# Altium PCB KOSVT-01.PcbDoc (part 1 of 2)
Units mm, origin at the board's own origin, x right, y up, seen from the top; angles counter-clockwise.
Board outline 70 x 45 mm, 4 copper layers (Top Layer, Layer 1, Layer 2, Bottom Layer), stack 0.954 mm thick; 78 components, 49 nets, 273 pads, 261 vias.
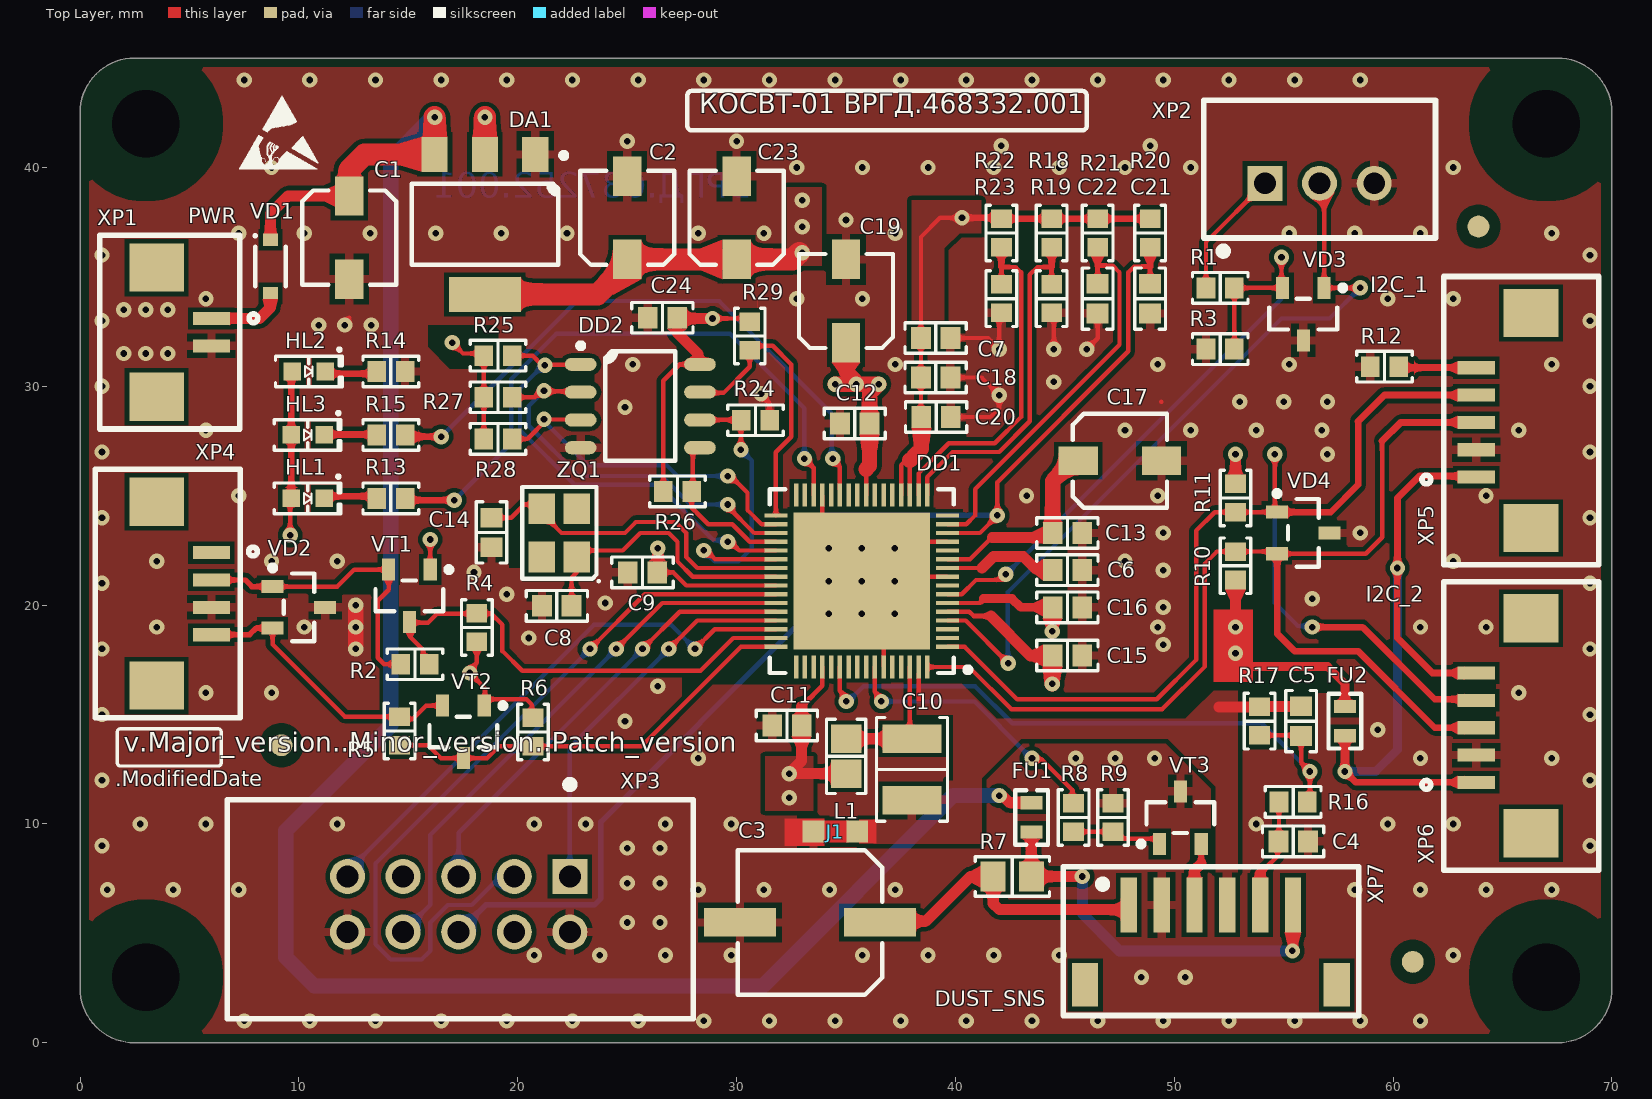
[diagram p0: Top Layer view]
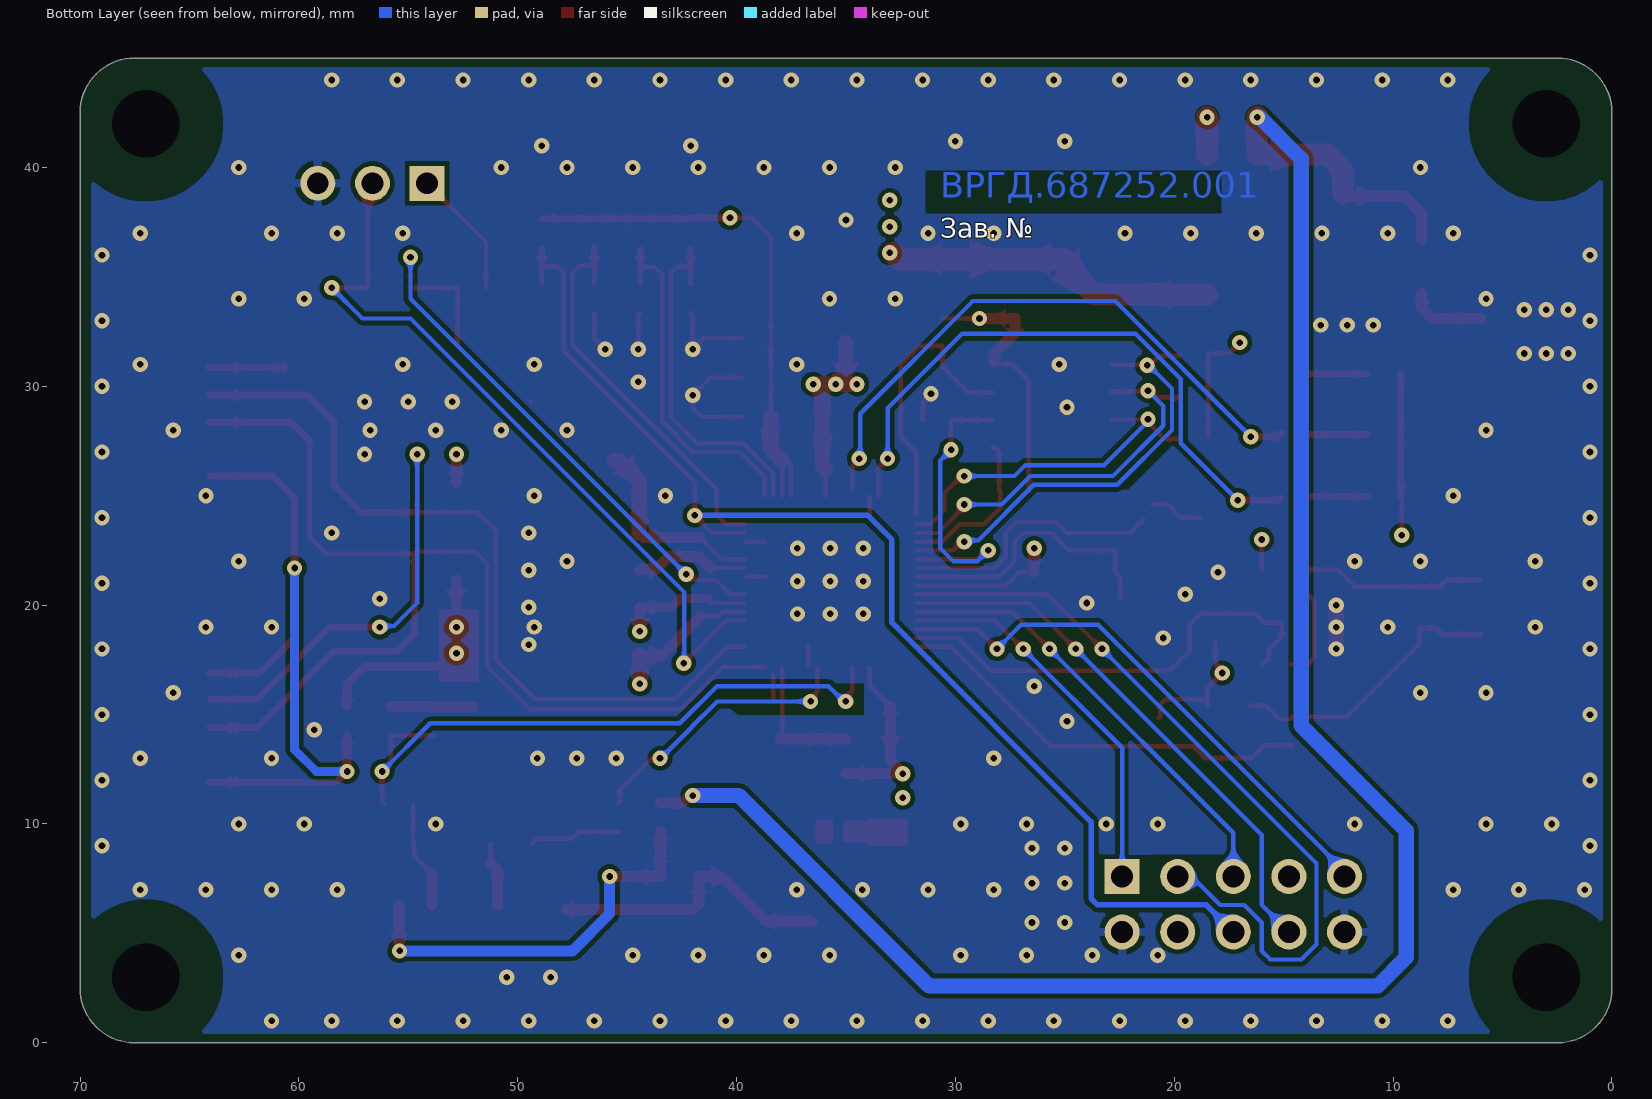
[diagram p1: Bottom Layer view, seen from below]
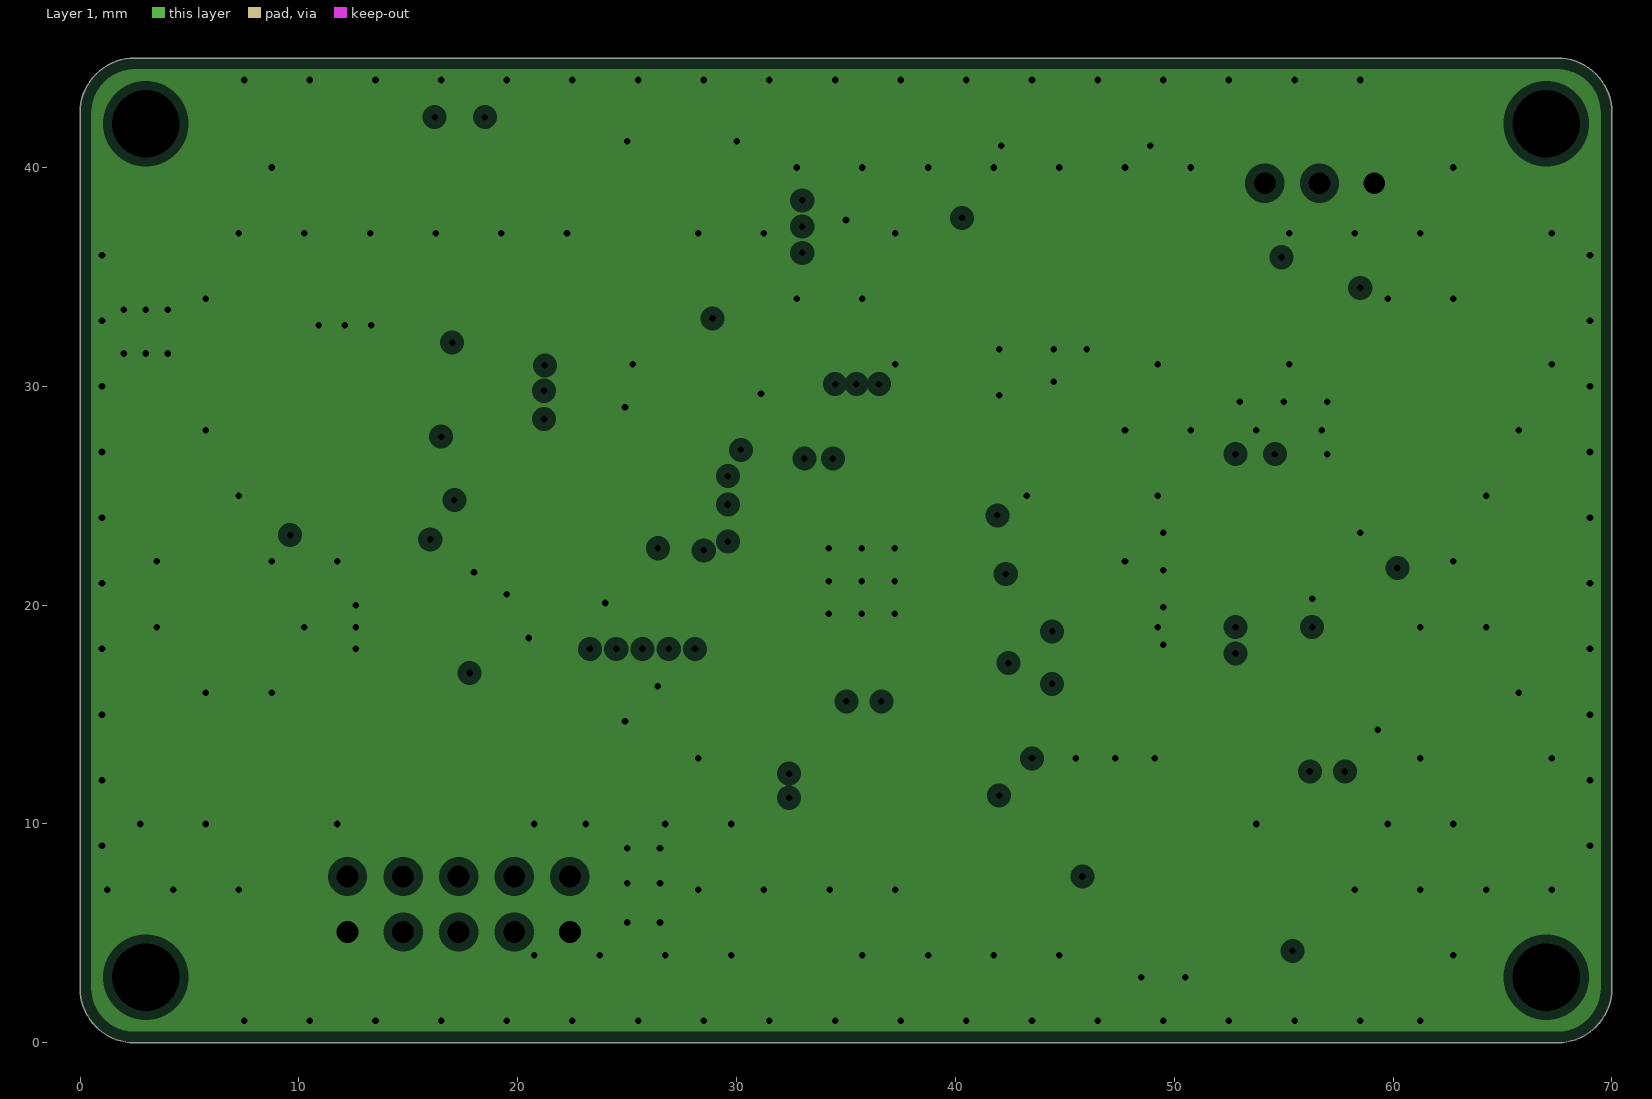
[diagram p2: Layer 1, clearances drawn from the general rule]
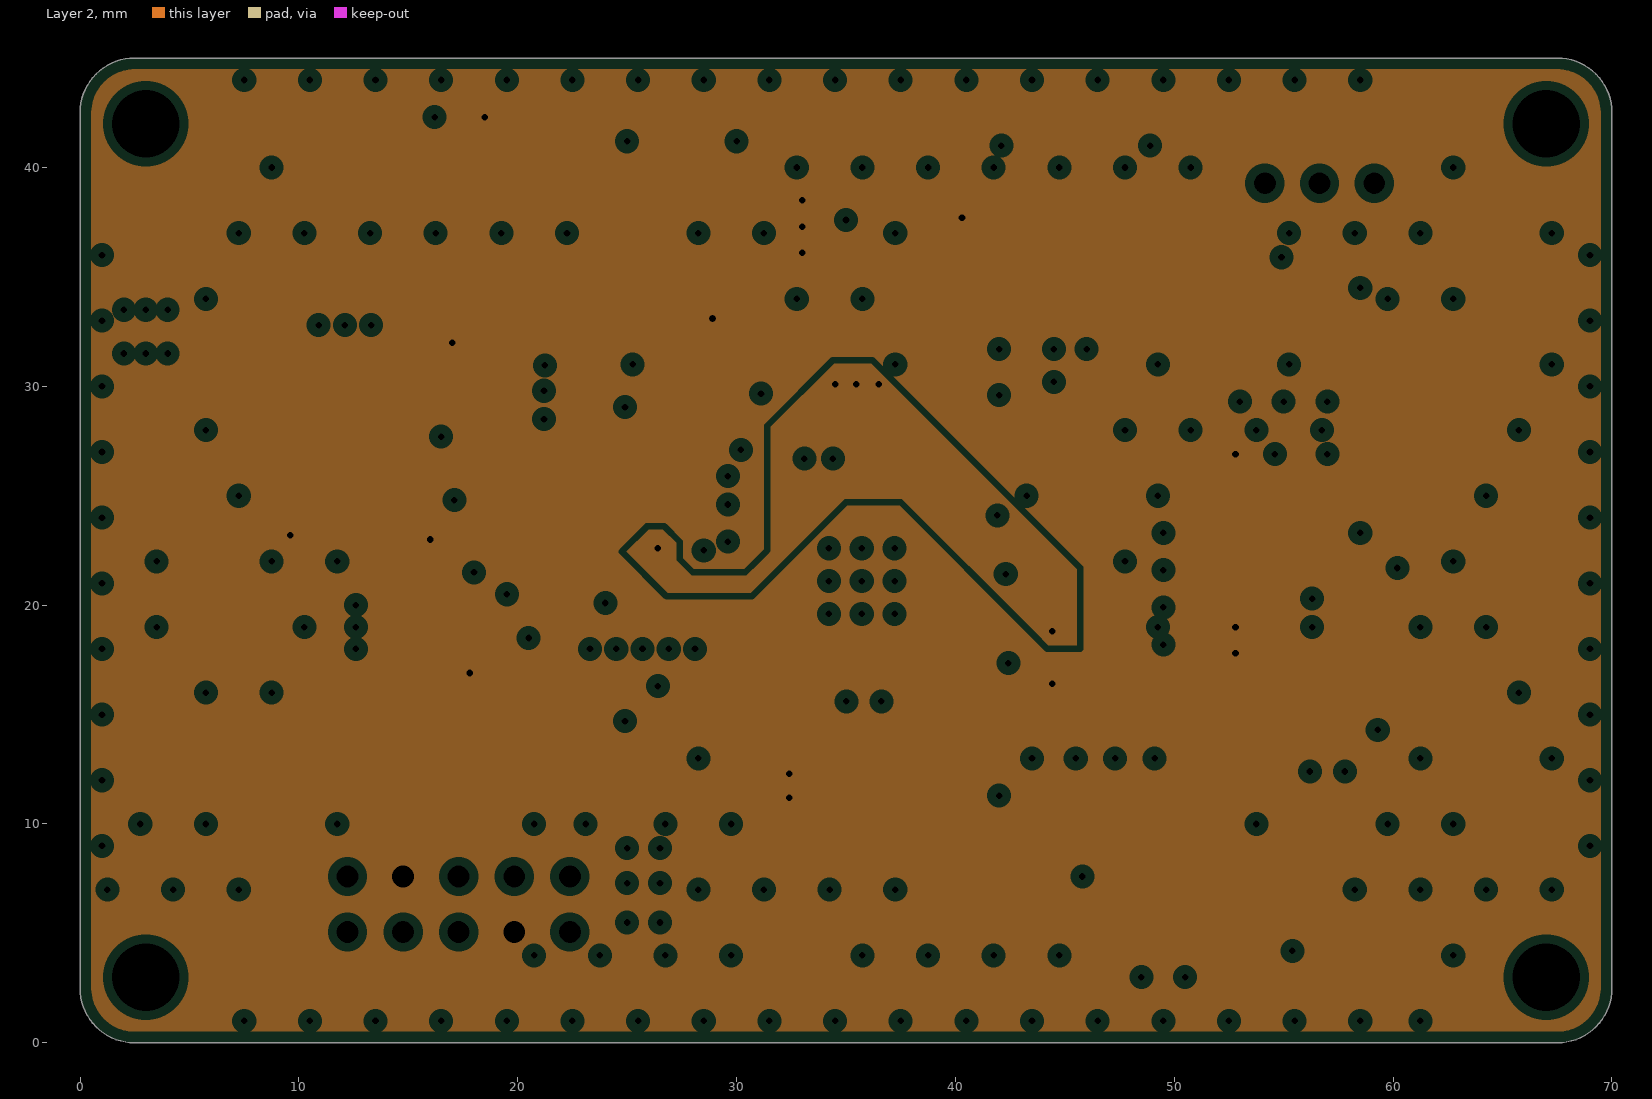
[diagram p3: Layer 2, clearances drawn from the general rule]
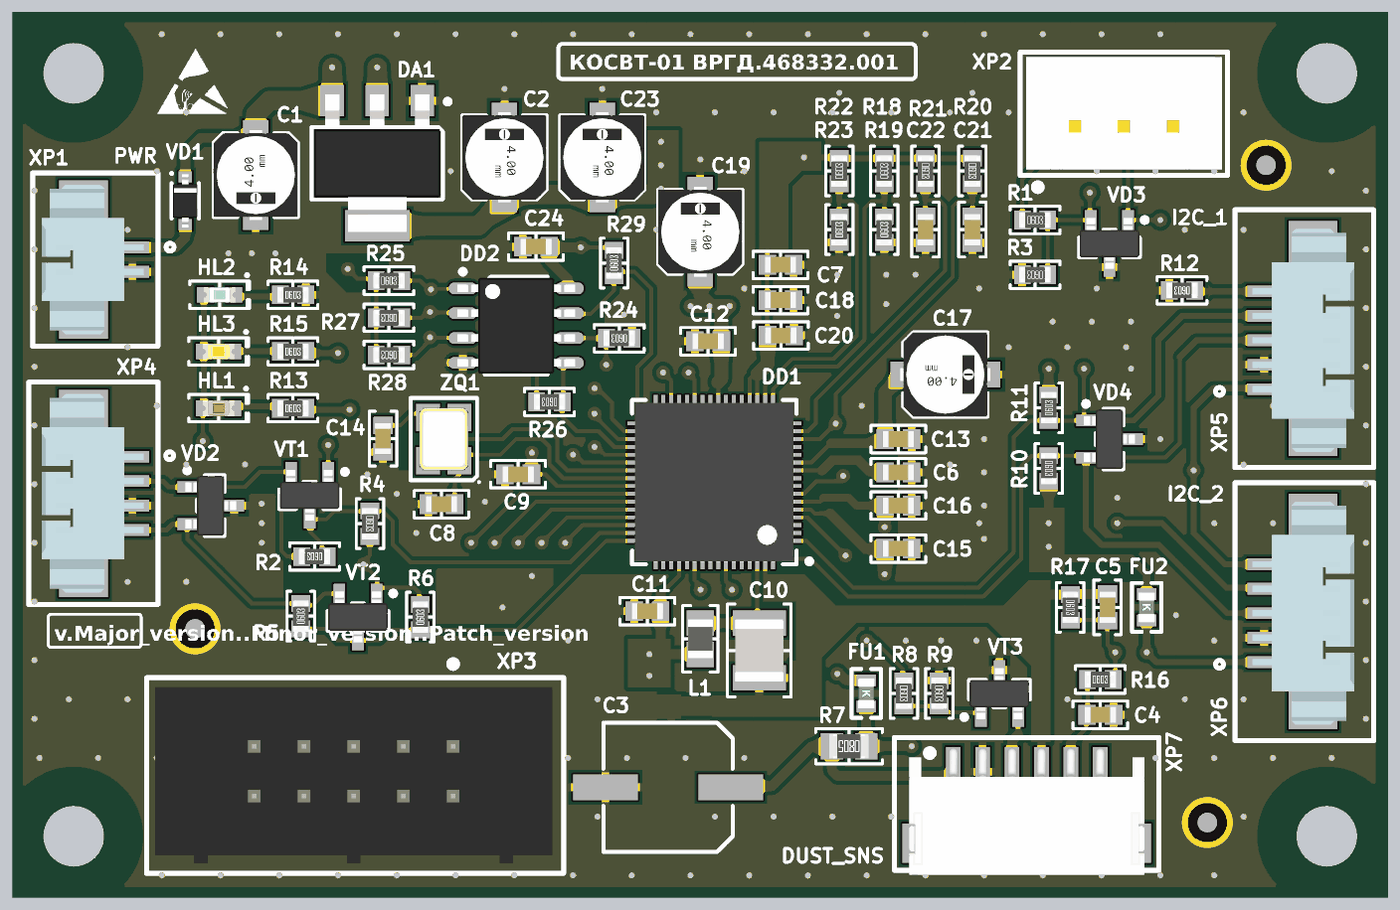
[diagram p4: 3D render of the assembled board from above, using the file's embedded part models]

## Layer stack, top to bottom
Top Solder: solder mask 0.0102, Solder Resist, Dk 3.5
Top Layer: signal copper 0.035
Dielectric 4: prepreg 0.076, FR4, Dk 3.6
Dielectric 2: prepreg 0.076, FR4, Dk 3.6
Layer 1: plane copper 0.035, net GND
Dielectric 1: core 0.51, FR4, Dk 4.6
Layer 2: plane copper 0.035, net +3V3
Dielectric 3: prepreg 0.076, FR4, Dk 3.6
Dielectric 5: prepreg 0.076, FR4, Dk 3.6
Bottom Layer: signal copper 0.035
Bottom Solder: solder mask 0.0102, Solder Resist, Dk 3.5

## Board outline
2.5,0 cw(c2.5,2.5) 0,2.5 0,42.5 cw(c2.5,42.5) 2.5,45 67.5,45 cw(c67.5,42.5) 70,42.5 70,2.5 cw(c67.5,2.5) 67.5,0

## Design rules (kind name [scope] priority, off if disabled: settings)
BoardOutlineClearance [All] p1: gap=0.4 ignorepadtopadclearanceinfootprint=FALSE
Clearance Clearance_RP [Name = 'Free-RP'] p1: gap=0.5 ignorepadtopadclearanceinfootprint=FALSE
Clearance Clearance_MH [Name = 'Free-MH'] p2: gap=2 ignorepadtopadclearanceinfootprint=FALSE
Clearance [All] p3: gap=0.2 ignorepadtopadclearanceinfootprint=FALSE
HoleSize [All] p1: absolutevalues=TRUE maxlimit=5 minlimit=0.025 maxpercent=80.000 minpercent=20.000
MinimumSolderMaskSliver [All] p1: minsoldermaskwidth=0.05
PlaneClearance [Name = 'Free-MH'] p1: clearance=2
PlaneClearance PlaneClearance_All [All] p2: clearance=0.4
PlaneConnect [All] p1: pad.planeconnectstyle=Relief pad.reliefexpansion=0.508 pad.reliefentries=4 pad.reliefconductorwidth=0.254 pad.reliefairgap=0.254 via.planeconnectstyle=Direct via.reliefexpansion=0.508 via.reliefentries=4 via.reliefconductorwidth=0.254 via.reliefairgap=0.254
PolygonConnect PolygonConnect_3V3 [InNet('+3V3')] p1: thpad.connectstyle=Relief thpad.reliefconductorwidth=0.5 thpad.reliefentries=4 thpad.polygonreliefangle="90 Angle" thpad.airgapwidth=0.3 smdpad.connectstyle=Relief smdpad.reliefconductorwidth=0.5 smdpad.reliefentries=4 smdpad.polygonreliefangle="90 Angle" smdpad.airgapwidth=0.3 via.connectstyle=Direct via.reliefconductorwidth=0.254 via.reliefentries=4 via.polygonreliefangle="90 Angle" via.airgapwidth=0.254
PolygonConnect PolygonConnect_AGND [InNet('AGND')] p2: thpad.connectstyle=Relief thpad.reliefconductorwidth=0.4 thpad.reliefentries=4 thpad.polygonreliefangle="90 Angle" thpad.airgapwidth=0.25 smdpad.connectstyle=Relief smdpad.reliefconductorwidth=0.4 smdpad.reliefentries=4 smdpad.polygonreliefangle="90 Angle" smdpad.airgapwidth=0.25 via.connectstyle=Direct via.reliefconductorwidth=0.254 via.reliefentries=4 via.polygonreliefangle="90 Angle" via.airgapwidth=0.254
PolygonConnect [All] p3: thpad.connectstyle=Relief thpad.reliefconductorwidth=0.4 thpad.reliefentries=4 thpad.polygonreliefangle="90 Angle" thpad.airgapwidth=0.25 smdpad.connectstyle=Relief smdpad.reliefconductorwidth=0.4 smdpad.reliefentries=4 smdpad.polygonreliefangle="90 Angle" smdpad.airgapwidth=0.25 via.connectstyle=Direct via.reliefconductorwidth=0.254 via.reliefentries=4 via.polygonreliefangle="90 Angle" via.airgapwidth=0.254
RoutingVias [All] p1: holewidth=0.3 width=1.2 viastyle="Through Hole" minholewidth=0.2 minwidth=0.6 maxholewidth=0.5 maxwidth=1
SilkToSilkClearance [All] p1: silktosilkclearance=0.2
SilkToSolderMaskClearance [IsPad] p1: minsilkscreentomaskgap=0.05 clearancetoexposedcopper=TRUE
SolderMaskExpansion [All] p1: expansion=0.102 istentingtop=FALSE
SupplyNets "Schematic Supply Nets_5" [InNet('GND')] p1: voltage=0.000
SupplyNets "Schematic Supply Nets_4" [InNet('+5V_Fus')] p2: voltage=0.000
SupplyNets "Schematic Supply Nets_3" [InNet('AGND')] p3: voltage=0.000
SupplyNets "Schematic Supply Nets_2" [InNet('+3V3_Fus')] p4: voltage=0.000
SupplyNets "Schematic Supply Nets_1" [InNet('+3V3')] p5: voltage=0.000
SupplyNets "Schematic Supply Nets" [InNet('+5V')] p6: voltage=0.000
Width [All] p1: maxlimit=1 minlimit=0.15 preferedwidth=0.2
24 further rules are at their usual default settings.

## Classes and differential pairs
component class MCU: C5 C6 C7 C8 C9 C10 C11 C12 C13 C14 C15 C16 C17 C18 C19 C20 C21 C22 C23 C24 DD1 DD2 HL1 HL2 HL3 J1 L1 R13 R14 R15 R16 R17 R18 R19 R20 R21 R22 R23 R24 R25 R26 R27 R28 R29 ZQ1
component class MAIN: C1 C2 C3 C4 DA1 FU1 FU2 R1 R2 R3 R4 R5 R6 R7 R8 R9 R10 R11 R12 VD1 VD2 VD3 VD4 VT1 VT2 VT3 XP1 XP2 XP3 XP4 XP5 XP6 XP7

## Components (designator, comment, footprint, x,y, rotation, side; value= is the part's Value field where it differs from the comment)
C1 "10uF" "CAP ALSMD ELEC 4.3MM H5.4MM" 12.3,36.8 r270 top
C2 "22uF" "CAP ALSMD ELEC 4.3MM H5.4MM" 25,37.7 r90 top
C3 "220uF" "CAP ALSMD ELEC 6.6MM H7.7MM" 33.353,5.5 r180 top
C4 "0.01uF" "CAP 0603_1608" 55.435,9.206 r0 top
C5 "0.01uF" "CAP 0603_1608" 55.8,14.7 r90 top
C6 "0.068uF" "CAP 0603_1608" 45.118,21.6 r180 top
C7 "0.068uF" "CAP 0603_1608" 39.1,32.208 r180 top
C8 "10pF" "CAP 0603_1608" 21.783,19.971 r0 top
C9 "0.068uF" "CAP 0603_1608" 25.7,21.5 r0 top
C10 "1uF" "CAP 1210_3225 - 1.8MM" 38.018,12.495 r90 top
C11 "0.068uF" "CAP 0603_1608" 32.3,14.5 r0 top
C12 "0.068uF" "CAP 0603_1608" 35.4,28.3 r0 top
C13 "0.068uF" "CAP 0603_1608" 45.118,23.3 r180 top
C14 "10pF" "CAP 0603_1608" 18.8,23.325 r90 top
C15 "0.068uF" "CAP 0603_1608" 45.118,17.7 r180 top
C16 "0.068uF" "CAP 0603_1608" 45.118,19.9 r180 top
C17 "2.2uF" "CAP ALSMD ELEC 4.3MM H5.4MM" 47.518,26.6 r0 top
C18 "0.068uF" "CAP 0603_1608" 39.1,30.404 r180 top
C19 "2.2uF" "CAP ALSMD ELEC 4.3MM H5.4MM" 35,33.9 r90 top
C20 "0.068uF" "CAP 0603_1608" 39.118,28.6 r180 top
C21 "0.068uF" "CAP 0603_1608" 48.9,34.006 r90 top
C22 "0.068uF" "CAP 0603_1608" 46.5,34.006 r90 top
C23 "10uF" "CAP ALSMD ELEC 4.3MM H5.4MM" 30,37.7 r90 top
C24 "0.068uF" "CAP 0603_1608" 26.612,33.134 r0 top
DA1 "AMS1117-3.3 UMW" "DIODES SOT-223" 18.5,37.4 r270 top
DD1 "К1948ВК018 АДКБ.431290.418ТУ" QFN40P800X800X76_HS-65M 35.718,21.1 r180 top
DD2 "W25Q16JVSNIQ" "WINBOND SOIC-8" 25.6,29.1 r0 top
FU1 "MF-FSMF010X Bourns" "FUSE 0603_1608 0.5MM" 43.479,10.3 r270 top
FU2 "MF-FSMF010X Bourns" "FUSE 0603_1608 0.5MM" 57.8,14.7 r270 top
HL1 "ИПД169А9-К АЕЯР.432220.765 ТУ" "LED 0603_1608 RED" 10.402,24.878 r0 top
HL2 "ИПД169А9-Л АЕЯР.432220.765 ТУ" "LED 0603_1608 GREEN" 10.452,30.678 r0 top
HL3 "ИПД169А9-Ж АЕЯР.432220.765 ТУ" "LED 0603_1608 YELLOW" 10.402,27.778 r0 top
J1 "=Value" NET_TIE_1MM 35.516,9.654 r180 top net-tie
L1 "220ohm 100MHz" "FER 0805_2012" 35.004,13.091 r270 top
R1 "1.2k" "RES 0603_1608"#1 52.1,34.5 r0 top
R2 "0" "RES 0603_1608"#1 15.3,17.3 r180 top
R3 "2k" "RES 0603_1608"#1 52.1,31.7 r180 top
R4 "4.7k" "RES 0603_1608"#1 18.13,18.978 r270 top
R5 "0" "RES 0603_1608"#1 14.6,14.25 r90 top
R6 "4.7k" "RES 0603_1608"#1 20.7,14.2 r90 top
R7 "150" "RES 0805_2012" 42.6,7.6 r180 top
R8 "10" "RES 0603_1608"#1 45.4,10.3 r270 top
R9 "10k" "RES 0603_1608"#1 47.204,10.3 r270 top
R10 "4.7k" "RES 0603_1608"#1 52.8,21.8 r270 top
R11 "4.7k" "RES 0603_1608"#1 52.8,24.9 r90 top
R12 "10k" "RES 0603_1608"#1 59.606,30.9 r180 top
R13 "470" "RES 0603_1608"#2 14.202,24.878 r0 top
R14 "470" "RES 0603_1608"#2 14.202,30.678 r0 top
R15 "470" "RES 0603_1608"#2 14.202,27.778 r0 top
R16 "4.7k" "RES 0603_1608"#1 55.435,11.01 r0 top
R17 "1.2k" "RES 0603_1608"#1 53.9,14.7 r270 top
R18 "0" "RES 0603_1608"#1 44.4,37.006 r90 top
R19 "10k" "RES 0603_1608"#1 44.4,34.006 r90 top
R20 "10k" "RES 0603_1608"#1 48.9,37.006 r270 top
R21 "10k" "RES 0603_1608"#1 46.5,37.006 r270 top
R22 "0" "RES 0603_1608"#1 42.1,37.006 r90 top
R23 "10k" "RES 0603_1608"#1 42.1,34.006 r90 top
R24 "10k" "RES 0603_1608"#1 30.863,28.451 r180 top
R25 "10k" "RES 0603_1608"#1 19.1,31.4 r0 top
R26 "10k" "RES 0603_1608"#1 27.3,25.2 r180 top
R27 "10k" "RES 0603_1608"#1 19.1,29.5 r180 top
R28 "10k" "RES 0603_1608"#1 19.1,27.6 r180 top
R29 "10k" "RES 0603_1608"#1 30.6,32.3 r90 top
VD1 "1N5817WS Hottech" "MCC SOD-323" 8.7,35.48 r90 top
VD2 "PESD5V0U1UT" "SOT-23-3 N" 10,19.9 r0 top
VD3 "PESD5V0U1UT" "SOT-23-3 N" 55.9,33.3 r270 top
VD4 "PESD5V0U1UT" "SOT-23-3 N" 55.9,23.3 r0 top
VT1 "2П526А9 АЕЯР.432140.897ТУ" "SOT-23-3 N" 15.051,20.426 r270 top
VT2 "2П526А9 АЕЯР.432140.897ТУ" "SOT-23-3 N" 17.519,14.208 r270 top
VT3 "2П526А9 АЕЯР.432140.897ТУ" "SOT-23-3 N" 50.283,10.291 r90 top
XP1 "DS1020-02-02MVT1R" DS1020-02-02MVT1R 6,33.1 r270 top locked
XP2 "DS1069-3MVW6X" CONNFLY_DS1069-3M 54.139,39.279 r0 top
XP3 "DS1013-10S" DS1013-10S 22.38,7.603 r0 top
XP4 "DS1020-02-04MVT1R" DS1020-02-04MVT1R 6,22.4 r270 top locked
XP5 "DS1020-02-05MVT1R" DS1020-02-05MVT1R 63.8,25.85 r90 top
XP6 "DS1020-02-05MVT1R" DS1020-02-05MVT1R 63.8,11.9 r90 top
XP7 "S6B-ZR-SM4A-TF" "JST S6B-ZR-SM4A-TF" 57.425,2.65 r180 top
ZQ1 "32MHz" XTAL3225X07N 21.9,23.3 r90 top

## Footprints (in the part's own frame and the unit in brackets; to place one, negate y for a bottom-side part, rotate by r counter-clockwise, add the part's x,y. Pads: shape width x height; smd on the part's side, far side on the other; paste and mask are expansions set on the pad)
"CAP 0603_1608" [mm] "Chip Capacitor, 2-Leads, Body 1.60x0.80mm, IPC Medium Density"
  rect 0.9x1 smd: 1(-0.675,0) 2(0.675,0)
  silkscreen extent -1.4,-0.7 1.4,0.7, body extent -0.8,-0.41 0.8,0.41, height 0.82
"CAP 1210_3225 - 1.8MM" [mm] "Chip Capacitor, 2-Leads, Body 3.20x2.50mm, IPC Medium Density"
  rect 1.3x2.7 smd: 1(-1.4,0) 2(1.4,0)
  silkscreen extent -2.37,-1.63 2.37,1.63, body extent -1.6,-1.25 1.6,1.25, height 1.8
"CAP ALSMD ELEC 4.3MM H5.4MM" [mm] "Aluminum SMD Electrolytic Capacitor, 4.30mm Land Size, 4.00mm Diameter, 5.40mm Height, 4.60mm Maximum Leads Span"
  rect 1.8x1.3 smd: 1(-1.9,0) 2(1.9,0)
  silkscreen extent -2.15,-2.15 2.15,2.15, body extent -2.3,-2.15 2.3,2.15, height 5.4
"CAP ALSMD ELEC 6.6MM H7.7MM" [mm] "Aluminum SMD Electrolytic Capacitor, 6.60mm Land Size, 6.30mm Diameter, 7.70mm Height, 8.00mm Maximum Leads Span"
  rect 3.3x1.3 smd: 1(-3.2,0) 2(3.2,0)
  silkscreen extent -3.3,-3.3 3.3,3.3, body extent -4,-3.3 4,3.3, height 7.7
CONNFLY_DS1069-3M [mm]
  rect 1.6x1.6 hole 1: 1(0,0)
  round 1.6 hole 1: 2(2.5,0) 3(5,0)
  silkscreen extent -2.8,-3.25 7.8,3.8, body extent -2.5,-2.2 7.5,3.55, height 7
"DIODES SOT-223" [mm] "SOT223, 4-Leads, Body 6.50x7.00mm (avg), Pitch 2.30mm, IPC Medium Density"
  rect 1.6x1.2 smd: 1(-3.2,2.3) 2(-3.2,0) 3(-3.2,-2.3)
  rect 1.6x3.3 smd: 4(3.2,0)
  silkscreen extent -3.27,-3.35 1.85,3.73, body extent -3.52,-3.25 3.5,3.25, height 1.8
DS1013-10S [mm]
  rect 1.6x1.6 hole 1: 1(0,0)
  round 1.6 hole 1: 2(0,-2.54) 3(-2.54,0) 4(-2.54,-2.54) 5(-5.08,0) 6(-5.08,-2.54) 7(-7.62,0) 8(-7.62,-2.54) 9(-10.16,0) 10(-10.16,-2.54)
  silkscreen extent -15.66,-6.5 5.64,4.35, body extent -15.23,-5.98 5.07,3.02, height 8.9
DS1020-02-02MVT1R [mm]
  rect 0.6x1.7 smd: 1(0,0) 2(1.25,0)
  rect 2.2x2.5 smd: M(-2.325,-2.5) M(3.575,-2.5)
  silkscreen extent -3.8,-5.1 5.05,2.12, body extent -3.2,-4.62 4.45,0.58, height 3.35
DS1020-02-04MVT1R [mm]
  rect 0.6x1.7 smd: 1(0,0) 2(1.25,0) 3(2.5,0) 4(3.75,0)
  rect 2.2x2.5 smd: M(-2.325,-2.5) M(6.075,-2.5)
  silkscreen extent -3.81,-5.3 7.55,2.1, body extent -3.2,-4.62 6.95,0.58, height 3.35
DS1020-02-05MVT1R [mm]
  rect 0.6x1.7 smd: 1(0,0) 2(1.25,0) 3(2.5,0) 4(3.75,0) 5(5,0)
  rect 2.2x2.5 smd: M(-2.325,-2.5) M(7.5,-2.5)
  silkscreen extent -4.01,-5.6 9.17,2.48, body extent -3.2,-4.6 8.2,0.6, height 3.35
"FER 0805_2012" [mm] "Chip Ferrite, 2-Leads, Body 2.00x1.20mm, IPC Medium Density"
  rect 1.3x1.4 smd: 1(-0.8,0) 2(0.8,0)
  silkscreen extent -1.7,-0.9 1.7,0.9, body extent -1,-0.64 1,0.64, height 1.26
"FUSE 0603_1608 0.5MM" [mm] "Chip Fuse 1.5A AC 5V DC, 2-Leads, Body 1.54x0.85mm"
  rect 0.6x1 smd: 1(-0.67,0) 2(0.67,0)
  silkscreen extent -1.25,-0.75 1.25,0.75, body extent -0.77,-0.42 0.77,0.43, height 0.58
"JST S6B-ZR-SM4A-TF" [mm]
  rect 0.75x2.5 smd: 1(9.5,-3.65) 2(8,-3.65) 3(6.5,-3.65) 4(5,-3.65) 5(3.5,-3.65) 6(2,-3.65)
  rect 1.2x2 smd: M(0,0) M(11.5,0)
  silkscreen extent -1,-5.4 12.5,1.4, body extent -0.25,-4.88 11.75,1.62, height 3.7
"LED 0603_1608 GREEN" [mm] "Chip Diode, 2-Leads, Body 1.60x0.80mm, IPC Medium Density"
  rect 0.8x0.8 smd: 1(-0.75,0) 2(0.75,0)
  silkscreen extent -1.52,-0.7 1.52,1.05, body extent -0.8,-0.4 0.8,0.4, height 0.53
"LED 0603_1608 RED" [mm] "Chip Diode, 2-Leads, Body 1.60x0.80mm, IPC Medium Density"
  rect 0.8x0.8 smd: 1(-0.75,0) 2(0.75,0)
  silkscreen extent -1.52,-0.7 1.52,1.05, body extent -0.8,-0.4 0.8,0.4, height 0.53
"LED 0603_1608 YELLOW" [mm] "Chip Diode, 2-Leads, Body 1.60x0.80mm, IPC Medium Density"
  rect 0.8x0.8 smd: 1(-0.75,0) 2(0.75,0)
  silkscreen extent -1.52,-0.7 1.52,1.05, body extent -0.8,-0.4 0.8,0.4, height 0.53
"MCC SOD-323" [mm] "SOD-323, 2-Leads, Body 1.70x1.25mm"
  rect 0.56x0.69 smd: 1(-1.22,0) 2(1.22,0)
  silkscreen extent -0.9,-0.7 1.45,0.75, body extent -1.36,-0.63 1.36,0.63, height 1.2
NET_TIE_1MM [mm]
  rect 1x1 smd paste-2539.97 mask-2539.97: 1(0,0)
  rect 1x1 smd paste-2539.97 mask+0.102: 2(2,0)
  Top Layer region: 0.4,-0.5 1.6,-0.5 1.6,0.5 0.4,0.5
QFN40P800X800X76_HS-65M [mm] "QFN, 64-Leads, Body 8,00x8,00mm, Pitch 0,40mm, Thermal Pad 6,25x6,25mm, IPC Low Density"
  rect 1.05x0.2 smd: 1(-3.925,3) 2(-3.925,2.6) 3(-3.925,2.2) 4(-3.925,1.8) 5(-3.925,1.4) 6(-3.925,1) 7(-3.925,0.6) 8(-3.925,0.2) 9(-3.925,-0.2) 10(-3.925,-0.6) 11(-3.925,-1) 12(-3.925,-1.4) 13(-3.925,-1.8) 14(-3.925,-2.2) 15(-3.925,-2.6) 16(-3.925,-3) 33(3.925,-3) 34(3.925,-2.6) 35(3.925,-2.2) 36(3.925,-1.8) 37(3.925,-1.4) 38(3.925,-1) 39(3.925,-0.6) 40(3.925,-0.2) 41(3.925,0.2) 42(3.925,0.6) 43(3.925,1) 44(3.925,1.4) 45(3.925,1.8) 46(3.925,2.2) 47(3.925,2.6) 48(3.925,3)
  rect 0.2x1.05 smd: 17(-3,-3.925) 18(-2.6,-3.925) 19(-2.2,-3.925) 20(-1.8,-3.925) 21(-1.4,-3.925) 22(-1,-3.925) 23(-0.6,-3.925) 24(-0.2,-3.925) 25(0.2,-3.925) 26(0.6,-3.925) 29(1.8,-3.925) 31(2.6,-3.925) 32(3,-3.925) 49(3,3.925) 50(2.6,3.925) 51(2.2,3.925) 52(1.8,3.925) 53(1.4,3.925) 54(1,3.925) 55(0.6,3.925) 56(0.2,3.925) 57(-0.2,3.925) 58(-0.6,3.925) 59(-1,3.925) 60(-1.4,3.925) 61(-1.8,3.925) 62(-2.2,3.925) 63(-2.6,3.925) 64(-3,3.925)
  rect 0.2x1.05 smd mask+0.102: 27(1,-3.925) 28(1.4,-3.925) 30(2.2,-3.925)
  rect 6.25x6.25 smd: 65(0,0)
  silkscreen extent -4.98,-4.2 4.2,4.2, body extent -4.06,-4.06 4.06,4.06, height 0.76
"RES 0603_1608"#1 [mm] "Chip Resistor, 2-Leads, Body 1.60x0.80mm, IPC Medium Density"
  rect 0.85x0.95 smd: 1(-0.65,0) 2(0.65,0)
  silkscreen extent -1.27,-0.7 1.27,0.7, body extent -0.8,-0.4 0.8,0.4, height 0.45
"RES 0603_1608"#2 [mm] "Chip Resistor, 2-Leads, Body 1.60x0.80mm, IPC Medium Density"
  rect 0.85x0.95 smd: 1(-0.65,0)
  rect 0.85x0.95 smd mask+0.102: 2(0.65,0)
  silkscreen extent -1.27,-0.7 1.27,0.7, body extent -0.8,-0.4 0.8,0.4, height 0.45
"RES 0805_2012" [mm] "Chip Resistor, 2-Leads, Body 2.00x1.25mm, IPC Medium Density"
  rect 1.15x1.35 smd: 1(-0.875,0) 2(0.875,0)
  silkscreen extent -1.7,-0.9 1.7,0.9, body extent -1,-0.62 1,0.63, height 0.6
"SOT-23-3 N" [mm] "SOT23, 3-Leads, Body 2,93x2,45mm, Pitch 0,95mm, IPC Medium Density"
  rect 1x0.6 smd: 1(-1.2,0.95) 2(-1.2,-0.95) 3(1.2,0)
  silkscreen extent -1.32,-1.55 0.7,1.92, body extent -1.3,-1.53 1.3,1.53, height 1.11
"WINBOND SOIC-8" [mm] "SOIC, 8-Leads, Body 4.90x3.90mm, Pitch 1.27mm, IPC Medium Density"
  oval 1.45x0.6 smd: 1(-2.725,1.905) 2(-2.725,0.635) 3(-2.725,-0.635) 4(-2.725,-1.905) 5(2.725,-1.905) 6(2.725,-0.635) 7(2.725,0.635) 8(2.725,1.905)
  silkscreen extent -2.85,-2.5 1.6,2.88, body extent -3.01,-2.45 3.01,2.45, height 1.5
XTAL3225X07N [mm] "Crystal, 4-Leads, Body 2.50x3.20mm, Pitch 2.20mm, IPC Medium Density"
  rect 1.4x1.2 smd: 1(-1.1,-0.8) 2(1.1,-0.8) 3(1.1,0.8) 4(-1.1,0.8)
  silkscreen extent -2.25,-1.85 2.1,1.7, body extent -1.61,-1.26 1.61,1.26, height 0.6

## Part data
C1 C23: library part "К50-97 – 25В – 10мкФ (±20) % – ЕВАЯ.673541.054ТУ", "Конденсатор К50-97 – 25В – 10мкФ (±20) % – ЕВАЯ.673541.054ТУ", Dielectric type=Electrolytic, Manufacturer="АО Элеконд", Package="SMD D4x5.4", Tolerance="± 20%", Voltage=25V, Country=Россия, Group="Конденсаторы полярные", HelpURL=https://elecond.ru/pdf/k50-97.pdf, Manufacturer Part Number="К50-97 – 25В – 10мкФ (±20) % – ЕВАЯ.673541.054ТУ", Name="К50-97 – 25В – 10мкФ (±20) % – ЕВАЯ.673541.054ТУ", Type="Конденсатор электролитический"
C2: library part "К50-97 – 16В – 22мкФ (±20) % – ЕВАЯ.673541.054ТУ", "Конденсатор К50-97 – 16В – 22мкФ (±20) % – ЕВАЯ.673541.054ТУ", Dielectric type=Electrolytic, Manufacturer="АО Элеконд", Package="SMD D4x5.4", Tolerance="± 20%", Voltage=16V, Country=Россия, Group="Конденсаторы полярные", HelpURL=https://elecond.ru/pdf/k50-97.pdf, Manufacturer Part Number="К50-97 – 16В – 22мкФ (±20) % – ЕВАЯ.673541.054ТУ", Name="К50-97 – 16В – 22мкФ (±20) % – ЕВАЯ.673541.054ТУ", Type="Конденсатор электролитический"
C3: library part "К50-97 – 16В – 220мкФ (±20) % – ЕВАЯ.673541.054ТУ", "Конденсатор К50-97 – 16В – 220мкФ (±20) % – ЕВАЯ.673541.054ТУ", Dielectric type=Electrolytic, Manufacturer="АО Элеконд", Package="SMD D6.3x7.7", Tolerance="± 20%", Voltage=16V, Country=Россия, Group="Конденсаторы полярные", HelpURL=https://elecond.ru/pdf/k50-97.pdf, Manufacturer Part Number="К50-97 – 16В – 220мкФ (±20) % – ЕВАЯ.673541.054ТУ", Name="К50-97 – 16В – 220мкФ (±20) % – ЕВАЯ.673541.054ТУ", Type="Конденсатор электролитический"
C4 C5: library part "К10-83 - 50 В - 0,01 мкФ ±20 % - Н20 - N - 1 АЖЯР.673511.008 ТУ", "Конденсатор К10-83 - 50 В - 0,01 мкФ ±20 % - Н20 - N - 1 АЖЯР.673511.008 ТУ", Dielectric type=Н20, Manufacturer="АО «НИИ «Гириконд»", Package=SMD0603, Tolerance="± 20%", Voltage=50V, Country=Россия, Group=Конденсаторы, HelpURL=https://giricond.ru/upload/pdf/K/K10-83.pdf, Manufacturer Part Number="К10-83 - 50 В - 0,01 мкФ ±20 % - Н20 - N - 1 АЖЯР.673511.008 ТУ", Name="К10-83 - 50 В - 0,01 мкФ ±20 % - Н20 - N - 1 АЖЯР.673511.008 ТУ", Type="Конденсатор керамический"
C6 C7 C9 C11 C12 C13 C15 C16 C18 C20 C21 C22: library part "К10-83 - 10 В - 0,068 мкФ ±20 % - Н20 - N - 1 АЖЯР.673511.008 ТУ", "Конденсатор К10-83 - 10 В - 0,068 мкФ ±20 % - Н20 - N - 1 АЖЯР.673511.008 ТУ", Dielectric type=Н20, Manufacturer="АО «НИИ «Гириконд»", Package=SMD0603, Tolerance="± 20%", Voltage=10V, Country=Россия, Group=Конденсаторы, HelpURL=https://giricond.ru/upload/pdf/K/K10-83.pdf, Manufacturer Part Number="К10-83 - 10 В - 0,068 мкФ ±20 % - Н20 - N - 1 АЖЯР.673511.008 ТУ", Name="К10-83 - 10 В - 0,068 мкФ ±20 % - Н20 - N - 1 АЖЯР.673511.008 ТУ", Type="Конденсатор керамический"
C8 C14: library part "К10-83 - 50 В - 10 пФ ±10 % - МП0 - N - 1 АЖЯР.673511.008 ТУ", "Конденсатор К10-83 - 50 В - 10 пФ ±10 % - МП0 - N - 1 АЖЯР.673511.008 ТУ", Dielectric type=МП0, Manufacturer="АО «НИИ «Гириконд»", Package=SMD0603, Tolerance="± 10%", Voltage=50V, Country=Россия, Group=Конденсаторы, HelpURL=https://giricond.ru/upload/pdf/K/K10-83.pdf, Manufacturer Part Number="К10-83 - 50 В - 10 пФ ±10 % - МП0 - N - 1 АЖЯР.673511.008 ТУ", Name="К10-83 - 50 В - 10 пФ ±10 % - МП0 - N - 1 АЖЯР.673511.008 ТУ", Type="Конденсатор керамический"
C10: library part "К10-83 - 16 В - 1 мкФ ±20 % - Н20 - N - 1 АЖЯР.673511.008 ТУ", "Конденсатор К10-83 - 16 В - 1 мкФ ±20 % - Н20 - N - 1 АЖЯР.673511.008 ТУ", Dielectric type=Н20, Manufacturer="АО «НИИ «Гириконд»", Package=SMD1210, Tolerance="± 20%", Voltage=16V, Country=Россия, Group=Конденсаторы, HelpURL=https://giricond.ru/upload/pdf/K/K10-83.pdf, Manufacturer Part Number="К10-83 - 16 В - 1 мкФ ±20 % - Н20 - N - 1 АЖЯР.673511.008 ТУ", Name="К10-83 - 16 В - 1 мкФ ±20 % - Н20 - N - 1 АЖЯР.673511.008 ТУ", Type="Конденсатор керамический"
C17 C19: library part "К50-97 – 50В – 2,2мкФ (±20) % – ЕВАЯ.673541.054ТУ", "Конденсатор К50-97 – 50В – 2,2мкФ (±20) % – ЕВАЯ.673541.054ТУ", Dielectric type=Electrolytic, Manufacturer="АО Элеконд", Package="SMD D4x5.4", Tolerance="± 20%", Voltage=50V, Country=Россия, Group="Конденсаторы полярные", HelpURL=https://elecond.ru/pdf/k50-97.pdf, Manufacturer Part Number="К50-97 – 50В – 2,2мкФ (±20) % – ЕВАЯ.673541.054ТУ", Name="К50-97 – 50В – 2,2мкФ (±20) % – ЕВАЯ.673541.054ТУ", Type="Конденсатор электролитический"
C24: library part "К10-83 - 10 В - 0,068 мкФ ±20 % - Н20 АЖЯР.673511.008 ТУ", "Конденсатор К10-83 - 10 В - 0,068 мкФ ±20 % - Н20 АЖЯР.673511.008 ТУ", Dielectric type=Н20, Manufacturer="АО «НИИ «Гириконд»", Package=SMD0603, Tolerance="± 20%", Voltage=10V, Country=Россия, Group=Конденсаторы, HelpURL=https://giricond.ru/upload/pdf/K/K10-83.pdf, Manufacturer Part Number="К10-83 - 10 В - 0,068 мкФ ±20 % - Н20 АЖЯР.673511.008 ТУ", Name="К10-83 - 10 В - 0,068 мкФ ±20 % - Н20 АЖЯР.673511.008 ТУ", Type="Конденсатор керамический"
DA1: "Микросхема AMS1117-3.3", Input Voltage="4.5 to 12V", Manufacturer=UMW, Max Temperature=125°С, Min Temperature=-40°С, Output Current=1A, Output Voltage=3.3V, Package=SOT-223, Country=Китай, Group=Микросхемы, HelpURL=https://www.lcsc.com/datasheet/lcsc_datasheet_2412201207_UMW-Youtai-Semiconductor-Co---Ltd--AMS1117-3-3_C347222.pdf, Manufacturer Part Number="AMS1117-3.3 UMW", Name=AMS1117-3.3, Type="Линейный регулятор"
DD1: "Микроконтроллер К1948ВК018 АДКБ.431290.418ТУ", Manufacturer="АО «МИКРОН»", Max Temperature=85°С, Min Temperature=-45°С, Package=QFN40, Supply Voltage=3,3V, Country=Россия, Group=Микросхемы, HelpURL=https://mikron.ru/upload/docs/mcu/Information_AMUR_MIK32.pdf, Manufacturer Part Number="К1948ВК018 АДКБ.431290.418ТУ", Name="К1948ВК018 АДКБ.431290.418ТУ", Type=Микроконтроллер
DD2: "Память Flash W25Q16JVSNIQ", Manufacturer=Winbond, Max Temperature=85°С, Min Temperature=-40°С, Package=SOIC-8, Supply Voltage=3,3V, Country=Тайвань, Group=Микросхемы, HelpURL=https://static.chipdip.ru/lib/136/DOC012136857.pdf, Manufacturer Part Number=W25Q16JVSNIQ, Name=W25Q16JVSNIQ, Notes="16Mb(2M x 8)", Type="Память Flash"
FU1 FU2: "Предохранитель самовосстанавливающийся MF-FSMF010X", Manufacturer=Bourns, Package=SMD0603, Country=США, Group=Предохранители, HelpURL=https://static.chipdip.ru/lib/299/DOC012299906.pdf, I hold=0.1A, I trip=0.3A, Manufacturer Part Number="MF-FSMF010X Bourns", Name=MF-FSMF010X, Type="Предохранитель самовосстанавливающийся", V=15V
HL1: "Индикатор ИПД169А9-К АЕЯР.432220.765 ТУ", Manufacturer="АО «Протон»", Package=SMD1608, Country=Россия, Group=Светодиоды, Manufacturer Part Number="ИПД169А9-К АЕЯР.432220.765 ТУ", Max If=20mA, Name="Индикатор ИПД169А9-К АЕЯР.432220.765 ТУ", Type=Светодиод
HL2: "Индикатор ИПД169А9-Л АЕЯР.432220.765 ТУ", Manufacturer="АО «Протон»", Package=SMD1608, Country=Россия, Group=Светодиоды, Manufacturer Part Number="ИПД169А9-Л АЕЯР.432220.765 ТУ", Max If=20mA, Name="Индикатор ИПД169А9-Л АЕЯР.432220.765 ТУ", Type=Светодиод
HL3: "Индикатор ИПД169А9-Ж АЕЯР.432220.765 ТУ", Manufacturer="АО «Протон»", Package=SMD1608, Country=Россия, Group=Светодиоды, Manufacturer Part Number="ИПД169А9-Ж АЕЯР.432220.765 ТУ", Max If=20mA, Name="Индикатор ИПД169А9-Ж АЕЯР.432220.765 ТУ", Type=Светодиод
J1: library part NET_TIE_1MM, "Перемычка SMD NET_TIE_1MM", Group=Перемычки, Manufacturer Part Number=NET_TIE_1MM, Name=NET_TIE_1MM, Type="Перемычка SMD"
L1: library part BLM21PG221SN1D, "Индуктивность ЭМП 0805-2A-220Ом ± 25% 100MHz", Current=2000mA, Manufacturer="Murata Electronics", Package=SMD0805, Tolerance=±25%, Country=Япония, Group=Индуктивности, HelpURL=https://static.chipdip.ru/lib/250/DOC000250690.pdf, Manufacturer Part Number=BLM21PG221SN1D, Name=BLM21PG221SN1D, Rdc=0.05Ohm, Type="Дроссель ЭМП"
R1 R17: library part "Резистор Р1-12 - 0,1 - 1,2кОм - ±1 % - У - \"А\" АЛЯР.434110.005 ТУ", "Резистор Р1-12 - 0,1 - 1,2кОм - ±1 % - У - \"А\" АЛЯР.434110.005 ТУ", Manufacturer="АО «НПО «ЭРКОН»", Package=SMD0603, Power=0.1W, Tolerance="± 1%", Voltage=50V, Country=Россия, Group=Резисторы, HelpURL=https://www.erkon-nn.ru/upload/model_library/R1-12/r1-12_5.pdf, Manufacturer Part Number="Резистор Р1-12 - 0,1 - 1,2кОм - ±1 % - У - \"А\" АЛЯР.434110.005 ТУ", Name="Резистор Р1-12 - 0,1 - 1,2кОм - ±1 % - У - \"А\" АЛЯР.434110.005 ТУ", Type=Резистор
R2 R5 R18 R22: library part "Резистор Р1-12М - 0603 - 0 - А - М - АБШК.434110.023 ТУ", "Резистор Р1-12М - 0603 - 0 - А - М - АБШК.434110.023 ТУ", Manufacturer="АО «НПО «ЭРКОН»", Package=SMD0603, Country=Россия, Group=Резисторы, HelpURL=https://www.erkon-nn.ru/upload/model_library/R1-12/r1-12_5.pdf, Manufacturer Part Number="Резистор Р1-12М - 0603 - 0 - А - М - АБШК.434110.023 ТУ", Name="Р1-12М - 0603 - 0 - А - М - АБШК.434110.023 ТУ", Type=Резистор
R3: library part "Резистор Р1-12 - 0,1 - 2кОм - ±1 % - У - \"А\" АЛЯР.434110.005 ТУ", "Резистор Р1-12 - 0,1 - 2кОм - ±1 % - У - \"А\" АЛЯР.434110.005 ТУ", Manufacturer="АО «НПО «ЭРКОН»", Package=SMD0603, Power=0.1W, Tolerance="± 1%", Voltage=50V, Country=Россия, Group=Резисторы, HelpURL=https://www.erkon-nn.ru/upload/model_library/R1-12/r1-12_5.pdf, Manufacturer Part Number="Резистор Р1-12 - 0,1 - 2кОм - ±1 % - У - \"А\" АЛЯР.434110.005 ТУ", Name="Резистор Р1-12 - 0,1 - 2кОм - ±1 % - У - \"А\" АЛЯР.434110.005 ТУ", Type=Резистор
R4 R6 R10 R11 R16: library part "Резистор Р1-12 - 0,1 - 4,7кОм - ±1 % - У - \"А\" АЛЯР.434110.005 ТУ", "Резистор Р1-12 - 0,1 - 4,7кОм - ±1 % - У - \"А\" АЛЯР.434110.005 ТУ", Manufacturer="АО «НПО «ЭРКОН»", Package=SMD0603, Power=0.1W, Tolerance="± 1%", Voltage=50V, Country=Россия, Group=Резисторы, HelpURL=https://www.erkon-nn.ru/upload/model_library/R1-12/r1-12_5.pdf, Manufacturer Part Number="Резистор Р1-12 - 0,1 - 4,7кОм - ±1 % - У - \"А\" АЛЯР.434110.005 ТУ", Name="Резистор Р1-12 - 0,1 - 4,7кОм - ±1 % - У - \"А\" АЛЯР.434110.005 ТУ", Type=Резистор
R7: library part "Резистор Р1-12 - 0,125 - 150Ом - ±1 % - У - \"А\" АЛЯР.434110.005 ТУ", "Резистор Р1-12 - 0,125 - 150Ом - ±1 % - У - \"А\" АЛЯР.434110.005 ТУ", Manufacturer="АО «НПО «ЭРКОН»", Package=SMD0805, Power=0.125W, Tolerance="± 1%", Voltage=150V, Country=Россия, Group=Резисторы, HelpURL=https://www.erkon-nn.ru/upload/model_library/R1-12/r1-12_5.pdf, Manufacturer Part Number="Резистор Р1-12 - 0,125 - 150Ом - ±1 % - У - \"А\" АЛЯР.434110.005 ТУ", Name="Резистор Р1-12 - 0,125 - 150Ом - ±1 % - У - \"А\" АЛЯР.434110.005 ТУ", Type=Резистор
R8: library part "Резистор Р1-12 - 0,1 - 10Ом - ±1 % - У - \"А\" АЛЯР.434110.005 ТУ", "Резистор Р1-12 - 0,1 - 10Ом - ±1 % - У - \"А\" АЛЯР.434110.005 ТУ", Manufacturer="АО «НПО «ЭРКОН»", Package=SMD0603, Power=0.1W, Tolerance="± 1%", Voltage=50V, Country=Россия, Group=Резисторы, HelpURL=https://www.erkon-nn.ru/upload/model_library/R1-12/r1-12_5.pdf, Manufacturer Part Number="Резистор Р1-12 - 0,1 - 10Ом - ±1 % - У - \"А\" АЛЯР.434110.005 ТУ", Name="Резистор Р1-12 - 0,1 - 10Ом - ±1 % - У - \"А\" АЛЯР.434110.005 ТУ", Type=Резистор
R9 R12 R19 R20 R21 R23 R24 R25 R26 R27 R28 R29: library part "Резистор Р1-12 - 0,1 - 10кОм - ±1 % - У - \"А\" АЛЯР.434110.005 ТУ", "Резистор Р1-12 - 0,1 - 10кОм - ±1 % - У - \"А\" АЛЯР.434110.005 ТУ", Manufacturer="АО «НПО «ЭРКОН»", Package=SMD0603, Power=0.1W, Tolerance="± 1%", Voltage=50V, Country=Россия, Group=Резисторы, HelpURL=https://www.erkon-nn.ru/upload/model_library/R1-12/r1-12_5.pdf, Manufacturer Part Number="Резистор Р1-12 - 0,1 - 10кОм - ±1 % - У - \"А\" АЛЯР.434110.005 ТУ", Name="Резистор Р1-12 - 0,1 - 10кОм - ±1 % - У - \"А\" АЛЯР.434110.005 ТУ", Type=Резистор
R13 R14 R15: library part "Резистор Р1-12 - 0,1 - 470Ом - ±1 % - У - \"А\" АЛЯР.434110.005 ТУ", "Резистор Р1-12 - 0,1 - 470Ом - ±1 % - У - \"А\" АЛЯР.434110.005 ТУ", Manufacturer="АО «НПО «ЭРКОН»", Package=SMD0603, Power=0.1W, Tolerance="± 1%", Voltage=50V, Country=Россия, Group=Резисторы, HelpURL=https://www.erkon-nn.ru/upload/model_library/R1-12/r1-12_5.pdf, Manufacturer Part Number="Резистор Р1-12 - 0,1 - 470Ом - ±1 % - У - \"А\" АЛЯР.434110.005 ТУ", Name="Резистор Р1-12 - 0,1 - 470Ом - ±1 % - У - \"А\" АЛЯР.434110.005 ТУ", Type=Резистор
VD1: "Диод Шоттки 1N5817WS", Manufacturer=Hottech, Package=SOD-323, Country=Китай, Group=Диоды, Manufacturer Part Number="1N5817WS Hottech", Max If=1A, Max Vr=20V, Name=1N5817WS, Type="Диод Шоттки"
VD2 VD3 VD4: "Диод ESD PESD5V0U1UT", Manufacturer="UTD Semiconductor", Package=SOT23-132, Country=Китай, Group=Диоды, Manufacturer Part Number=PESD5V0U1UT, Name=PESD5V0U1UT, Type="Сборка ESD диодов", Vrwm=5V
VT1 VT2 VT3: "Транзистор 2П526А9 АЕЯР.432140.897ТУ", Manufacturer="Кремний Эл", Package=SOT-23-132, Country=Россия, Group=Транзисторы, HelpURL=https://group-kremny.ru/catalog/diskretnye-poluprovodniki/polevye-tranzistory/2p526a9/, Id/Ic=1.2A, Manufacturer Part Number="2П526А9 АЕЯР.432140.897ТУ", Name="2П526А9 АЕЯР.432140.897ТУ", Struct=N-MOSFET, Type="Транзистор полевой", Vds/Vce=30V, Vth=2V
XP1: "Соединитель DS1020-02-02MVT1R", Manufacturer=Connfly, Max Temperature=105°С, Min Temperature=-40°С, Nominal Voltage=250V, Country=Китай, Group=Соединители, Manufacturer Part Number=DS1020-02-02MVT1R, Name=DS1020-02-02MVT1R, Net_1=+5В, Net_2=GND, Pins number=2, Rows=1, Type="Вилка угловая"
XP2: "Соединитель DS1069-3MVW6X", Manufacturer=Connfly, Max Temperature=85°С, Min Temperature=-25°С, Nominal current=3A, Nominal Voltage=250V, Country=Китай, Group=Соединители, Manufacturer Part Number=DS1069-3MVW6X, Name=DS1069-3MVW6X, Net_1=RX, Net_2=TX, Net_3=GND, Pins number=3, Rows=1, Type="Вилка прямая"
XP3: "Соединитель DS1013-10S", Manufacturer=Connfly, Max Temperature=105°С, Min Temperature=-40°С, Nominal current=1A, Nominal Voltage=500V, Country=Китай, Group=Соединители, Manufacturer Part Number=DS1013-10S, Name=DS1013-10S, Net_1=J_TCK, Net_2=GND, Net_3=J_TDO, Net_4=+3.3В, Net_5=J_TMS, Net_6=nRST, Net_7=+3.3В, Net_8=J_TRSTn, Net_9=J_TDI, Net_10=GND, Pins number=10, Rows=2, Type="Вилка прямая"
XP4: "Соединитель DS1020-02-04MVT1R", Manufacturer=Connfly, Max Temperature=105°С, Min Temperature=-40°С, Nominal Voltage=250V, Country=Китай, Group=Соединители, Manufacturer Part Number=DS1020-02-04MVT1R, Name=DS1020-02-04MVT1R, Net_1=Резерв, Net_2=IPMB_SCLK, Net_3=GND, Net_4=IPMB_SDA, Pins number=4, Rows=1, Type="Вилка угловая"
XP5 XP6: "Соединитель DS1020-02-05MVT1R", Manufacturer=Connfly, Max Temperature=105°С, Min Temperature=-40°С, Nominal Voltage=250V, Country=Китай, Group=Соединители, Manufacturer Part Number=DS1020-02-05MVT1R, Name=DS1020-02-05MVT1R, Net_2=GND, Net_4=SDA, Pins number=5, Rows=1, Type="Вилка угловая"
  XP5: Net_1=+3.3V, Net_3=SCLK, Net_5=Pin_GND
  XP6: Net_1=+3.3В, Net_3=SLCK, Net_5=Pin_3V3
XP7: "Соединитель S6B-ZR-SM4A-TF", Manufacturer=JST, Max Temperature=85°С, Min Temperature=-25°С, Nominal current=1A, Nominal Voltage=50V, Country=Китай, Group=Соединители, Manufacturer Part Number=S6B-ZR-SM4A-TF, Name=S6B-ZR-SM4A-TF, Net_1=Резерв, Net_2=Резерв, Net_3=Резерв, Net_4=Резерв, Net_5=Резерв, Net_6=Резерв, Pins number=6, Rows=1, Type="Вилка угловая"
ZQ1: library part "РК1009-7ВП-32000К-В  (10 пФ) КЖБД.433514.031 ТУ", "Резонатор кварцевый РК1009-7ВП-32000К-В  (10 пФ) КЖБД.433514.031 ТУ", Load Capacity=10pF, Manufacturer="АО Пьезо", Package=SMD32x25x07, Tolerance="±20 ppm", Country=Россия, ESR=60Ohm, Freq=32MHz, Group=Кварцы, HelpURL=https://www.oaopiezo.com/assets/files/quartz/rk1009-SMD3225.pdf, Manufacturer Part Number="РК1009-7ВП-32000К-В  (10 пФ) КЖБД.433514.031 ТУ", Name="РК1009-7ВП-32000К-В  (10 пФ) КЖБД.433514.031 ТУ", Type="Кварцевый резонатор"

## Free pads (board coordinates)
  round 0 hole 3.1 unplated: MH(3,3) MH(3,42) MH(67,3) MH(67,42)
  round 1 smd mask+0.8: RP(9.2,13.6) RP(60.9,3.7) RP(63.9,37.3)

## Via types
v1: diameter 0.7, hole 0.3, Top Layer to Bottom Layer, tented both sides, 171 vias
v2: diameter 0.7/0.7 (per signal layer), hole 0.3, Top Layer to Bottom Layer, tented both sides, 90 vias

## Nets (pads, with @x,y where several pads share a name; then routed paths per layer and width w, separated by ;. In a path a pad name is that pad's centre, name@x,y a point inside that pad or via, vN(x,y) a via of type N, cw(c..) or ccw(c..) an arc to the next point about the centre after c; other vN are vias at no path point)
+3V3: C2.1 C7.2 C11.2 C15.2 C18.2 C20.2 C23.1 C24.2 DA1.2 DA1.4 DD1.5 DD1.19 DD1.20 DD1.52 DD2.8 FU2.1 HL1.1 HL2.1 HL3.1 L1.2 R4.2 R6.2 R10.2 R11.2 R18.2 R20.1 R21.1 R22.2 R25.1 R26.2 R27.2 R28.2 R29.2 VT1.1 VT2.1 XP3.4 XP3.7 | length 101.1
  Top Layer w0.2: v1(9.6,23.2) 9.6,24.826 HL1.1 ; HL2.1@9.652,30.628 HL2.1 ; v1(16,23) 16,21.627 VT1.1 ; v1(17,32) v1@17.096,31.904 ; v1@17.096,31.758 v1@17.096,31.904 ; R4.2 18.13,17.365 17.8,17.035 v1(17.8,16.9) 18.5,16.2 VT2.1@18.5,15.44 ; R28.2@18.45,27.7 18.45,29.6 18.45,31.5 17.5,31.5 v1@17.096,31.904 ; VT2.1 VT2.1@18.5,15.44 ; R6.2 20.642,14.908 20.642,15.458 20.4,15.7 18.669,15.7 18.5,15.531 VT2.1@18.5,15.44 ; C2.1@25,35.55 C2.1 ; R26.2 26.65,30.25 27.405,31.005 DD2.8 DD2.8@28.233,31.097 ; C24.2@27.27,33.117 C24.2 C24.2@27.321,33.1 ; v1(28.9,33.1) 30.55,33.1 R29.2@30.6,33.15 ; v1@32.865,36.1 v1(33,36.1) ; 32.975,15.375 33.918,16.318 DD1.52 ; L1.2@34.995,12.3 L1.2 ; DD1.20 37.518,26.4 37.999,26.881 38.181,26.881 ; DD1.19 37.918,26.618 ; C20.2 38.425,28.618 C18.2 C7.2 38.425,36.825 39.3,37.7 v1(40.3,37.7) ; DD1.5 40.634,19.7 40.834,19.5 41.618,19.5 ; R22.2@42.056,37.7 R22.2
  Top Layer w0.3: HL1.1@9.652,24.978 HL3.1 HL2.1@9.652,30.628 ; v1(40.3,37.7) R22.2@42.056,37.7 ; R22.2 R18.2 R20.1
  Top Layer w0.4: v1(52.8,17.8) 53.4,17.2 57,17.2 57.8,16.4 FU2.1
  Top Layer w0.5: C24.2@27.27,33.117 27.27,32.451 28.233,31.488 DD2.8@28.233,31.097 ; C24.2@27.321,33.1 v1(28.9,33.1) ; 32.975,15.375 C11.2 32.975,12.875 v1(32.4,12.3) L1.2@34.995,12.3 ; 41.618,19.5 43.436,17.682 44.243,17.682 44.261,17.7 C15.2 ; v1(52.8,19) R10.2 ; R11.2@52.8,25.6 v1(52.8,26.9)
  Top Layer w0.7: 37.918,26.618 38.181,26.881 38.443,27.143 C20.2 ; v1(44.418,16.4) 44.418,17.675 C15.2
  Top Layer w1: DA1.4 23.65,34.2 C2.1@25,35.55 ; DA1.2 v1(18.5,42.3) ; C2.1 C23.1 32.565,35.8 v1@32.865,36.1
  other v1: 32.4,11.2 33,37.3 33,38.5
+3V3_Fus: FU2.2 XP5.1 XP6.1 XP6.5 | length 34.5
  Top Layer w0.2: XP5.1@64.05,25.9 XP5.1@64.1,25.85
  Top Layer w0.3: v1(57.8,12.4) 58.3,11.9 XP6.1@64.1,11.9 ; v1(60.2,21.7) 60.2,18.5 61.8,16.9 XP6.5@64.1,16.9
  Top Layer w0.32: v1(60.2,21.7) 60.2,24.9 61.2,25.9 XP5.1@64.05,25.9
  Top Layer w0.4: v1(57.8,12.4) FU2.2
  Bottom Layer w0.4: v1(57.8,12.4) 59.2,12.4 60.2,13.4 v1(60.2,21.7)
+5V: C1.1 DA1.3 FU1.1 VD1.2 | length 91.8
  Top Layer w0.2: C1.1@12.2,38.7 C1.1@12.3,38.8 ; v1(42,11.3) v1@42.135,11.3
  Top Layer w0.5: VD1.2 8.7,37.9 9.5,38.7 C1.1@12.2,38.7 ; v1@42.135,11.3 42.465,10.97 FU1.1
  Top Layer w1: C1.1@12.3,38.8 12.3,39.9 13,40.6 DA1.3 v1(16.2,42.3)
  Bottom Layer w0.7: v1(16.2,42.3) 16.1,42.3 14.2,40.4 14.2,14.5 9.4,9.7 9.4,3.9 10.7,2.6 31.2,2.6 39.9,11.3 v1(42,11.3)
+5V_Fus: FU1.2 R7.1 XP7.6 | length 18.4
  Top Layer w0.2: FU1.2@43.475,9.626 FU1.2
  Top Layer w0.5: FU1.2@43.475,9.626 R7.1 v1(45.8,7.6) ; v1@55.425,4.225 XP7.6
  Bottom Layer w0.5: v1(45.8,7.6) 45.8,5.9 47.5,4.2 v1(55.4,4.2)
AGND: C5.2 C10.1 DD1.63 J1.1 R17.1 XP7.4 | length 3.8
  Top Layer w0.5: 52.05,15.35 R17.1 53.925,15.375 C5.2
BOOT0: DD1.17 R18.1 R19.2 | length 16
  Top Layer w0.2: DD1.17 38.718,25.853 39.866,27 42,27 43.4,28.4 43.4,35.106 43.75,35.456 44.4,35.456 R19.2
  Top Layer w0.3: 44.4,35.456 R18.1@44.4,36.256
BOOT1: DD1.18 R22.1 R23.2 | length 16
  Top Layer w0.2: DD1.18 38.318,26.018 39.7,27.4 41.8,27.4 43,28.6 43,35.206 42.75,35.456 42.1,35.456 R23.2
  Top Layer w0.3: 42.1,35.456 R22.1@42.1,36.256
DUST_SNS_B: VT3.2 XP7.3 | length 2.9
  Top Layer w0.2: 51.233,8.203 VT3.2
  Top Layer w0.5: XP7.3 50.925,7.895 51.233,8.203
DUST_SNS_LED_CTRL: DD1.58 R8.1 | length 12.7
  Top Layer w0.2: DD1.58 36.318,16.035 36.618,15.735 v1(36.618,15.6) ; v1(43.5,13) 43.56,12.94 43.96,12.94 45.342,11.558 45.342,11.007 R8.1
  Bottom Layer w0.2: v1(36.618,15.6) 40.883,15.6 42.044,14.439 42.044,14.421 43.465,13 v1(43.5,13)
DUST_SNS_V: C4.1 R16.1 XP7.5 | length 5
  Top Layer w0.2: 53.925,7.725 54.723,8.523 54.723,9.169 C4.1 ; C4.1@54.785,9.131 R16.1@54.785,10.91
  Top Layer w0.5: XP7.5 53.925,7.725
DUST_SNS_V_MCU: C5.1 DD1.54 R16.2 R17.2 | length 30.3
  Top Layer w0.2: DD1.54 34.718,16.088 35.018,15.788 v1(35.018,15.6) ; R17.2@53.8,14.05 55.675,14.05 C5.1@55.7,14.025 ; C5.1 55.8,12.8 v1(56.2,12.4) ; R16.2@56.085,10.91 56.2,11.025 v1@56.2,12.461
  Bottom Layer w0.2: v1@34.918,15.418 35.8,16.3 40.9,16.3 42.6,14.6 54,14.6 v1(56.2,12.4)
GND: C1.2 C2.2 C3.2 C4.2 C6.1 C7.1 C8.1 C9.1 C11.1 C12.1 C13.1 C14.1 C15.1 C16.1 C17.2 C18.1 C19.2 C20.1 C21.1 C22.1 C23.2 C24.1 DA1.1 DD1.9 DD1.13 DD1.29 DD1.59 DD1.65 DD2.4 J1.2 R3.2 R9.1 R12.2 R14.2 R19.1 R23.1 R24.1 VD2.3 VD3.3 VD4.3 VT3.3 XP1.2 XP2.3 XP3.2 XP3.10 XP4.3 XP5.2 XP6.2 XP7.2 | length 17.4
  Top Layer w0.2: v1(12.1,32.8) 12.1,32.935 12.3,33.135 ; v1@12.365,19.9 12.465,20 v1(12.6,20) ; v1(31.115,29.665) 31.115,29.61 31.5,29.226 31.5,28.464 R24.1 ; C18.1 41.196,30.404 v1(42,29.6) 42,29 41.6,28.6 C20.1 ; C7.1 41.492,32.208 v1(42,31.7) 42,33.256 R23.1 ; R19.1 44.5,33.256 v1(44.5,31.7) ; v1(46,31.7) 46.5,32.2 C22.1 ; v1(49.1,13) v1@49.15,12.95 ; 49.4,29.3 49.418,29.282
  Top Layer w0.7: v1(12.6,18) v1(12.6,19) v1(12.6,20)
  other v1: 7.5,1 10.5,1 13.5,1 16.5,1 19.5,1 22.5,1 25.5,1 28.5,1 31.5,1 34.5,1 37.5,1 40.5,1 43.5,1 46.5,1 49.5,1 52.5,1 55.5,1 58.5,1 48.5,3 50.5,3 25,5.5 26.5,5.5 25,7.3 26.5,7.3 25,8.9 26.5,8.9 1,9 69,9 1,12 69,12 45.5,13 47.3,13 1,15 69,15 1,18 69,18 49.5,18.2 20.5,18.5 3.5,19 34.218,19.6 35.718,19.6 37.218,19.6 49.5,19.9 24,20.1 56.3,20.3 19.5,20.5 1,21 69,21 34.218,21.1 35.718,21.1 37.218,21.1 18,21.5 49.5,21.6 3.5,22 34.218,22.6 35.718,22.6 37.218,22.6 49.5,23.3 58.5,23.3 1,24 69,24 57,26.9 1,27 69,27 24.9,29.05 53,29.3 55,29.3 57,29.3 1,30 69,30 44.5,30.2 2,31.5 3,31.5 4,31.5 10.9,32.8 13.3,32.8 1,33 69,33 2,33.5 3,33.5 4,33.5 1,36 69,36 35,37.6 42.1,41 48.9,41 25,41.2 30,41.2 7.5,44 10.5,44 13.5,44 16.5,44 19.5,44 22.5,44 25.5,44 28.5,44 31.5,44 34.5,44 37.5,44 40.5,44 43.5,44 46.5,44 49.5,44 52.5,44 55.5,44 58.5,44
  other v2: 61.25,1 20.75,4 23.75,4 26.75,4 29.75,4 35.75,4 38.75,4 41.75,4 44.75,4 62.75,4 1.25,7 4.25,7 7.25,7 28.25,7 31.25,7 34.25,7 37.25,7 58.25,7 61.25,7 64.25,7 67.25,7 2.75,10 5.75,10 11.75,10 20.75,10 23.1,10 26.75,10 29.75,10 53.75,10 59.75,10 62.75,10 28.25,13 61.25,13 67.25,13 59.3,14.3 24.9,14.7 5.75,16 8.75,16 65.75,16 26.4,16.3 10.25,19 49.25,19 61.25,19 64.25,19 8.75,22 11.75,22 47.75,22 62.75,22 7.25,25 43.25,25 49.25,25 64.25,25 5.75,28 47.75,28 50.75,28 53.75,28 56.75,28 65.75,28 25.25,31 37.25,31 49.25,31 55.25,31 67.25,31 5.75,34 32.75,34 35.75,34 59.75,34 62.75,34 7.25,37 10.25,37 13.25,37 16.25,37 19.25,37 22.25,37 28.25,37 31.25,37 37.25,37 55.25,37 58.25,37 61.25,37 67.25,37 8.75,40 32.75,40 35.75,40 38.75,40 41.75,40 44.75,40 47.75,40 50.75,40 62.75,40
IPMB_SCLK_MCU: DD1.47 R2.1 R4.1 VT1.3 | length 21.5
  Top Layer w0.2: VT1.3@15.077,19.2 15.9,19.2 16.312,19.612 18.788,19.612 19.3,19.1 19.3,17.9 20.2,17 28.351,17 29.851,18.5 DD1.47 ; VT1.3@15.09,19.187 15.09,18.543 15.679,17.953 15.679,17.571 R2.1
IPMB_SDA_MCU: DD1.48 R5.1 R6.1 VT2.3 | length 19.5
  Top Layer w0.2: R5.1 15.9,13.6 16.492,13.008 VT2.3 ; VT2.3@17.6,13.008 18.592,13.008 19.134,13.55 R6.1 25.65,13.55 30.2,18.1 DD1.48
JTAG_TCK: DD1.45 XP3.1 | length 17.7
  Top Layer w0.2: v1(26.9,18) 28.2,19.3 30.265,19.3 DD1.45
  Bottom Layer w0.2: XP3.1 22.38,13.48 v1(26.9,18)
JTAG_TDI: DD1.46 XP3.9 | length 25.3
  Top Layer w0.2: v1(28.1,18) 29,18.9 DD1.46
  Bottom Layer w0.2: XP3.9 12.22,7.839 23.481,19.1 27,19.1 v1(28.1,18)
JTAG_TDO: DD1.42 XP3.3 | length 36
  Top Layer w0.2: v1(23.3,18) 25.8,20.5 29.768,20.5 DD1.42
  Bottom Layer w0.2: XP3.3 19.572,7.335 18.935,7.335 17.9,6.3 16.8,6.3 16,5.5 16,4.2 15.606,3.806 14.194,3.806 14.135,3.865 13.5,4.5 13.5,8.2 v1(23.3,18)
JTAG_TMS: DD1.44 XP3.5 | length 20.7
  Top Layer w0.2: v1(25.7,18) 27.4,19.7 30.099,19.7 ; 30.099,19.7 DD1.44
  Bottom Layer w0.2: XP3.5 17.3,9.6 v1(25.7,18)
JTAG_TRSTn: DD1.43 XP3.8 | length 25.1
  Top Layer w0.2: v1(24.5,18) 26.6,20.1 29.934,20.1 DD1.43
  Bottom Layer w0.2: XP3.8 16,6.302 16,9.5 v1(24.5,18)
LED_B_MCU: DD1.27 R15.2 | length 27.7
  Top Layer w0.2: v1(34.4,26.7) 34.4,26.651 34.718,26.333 DD1.27@34.718,25.3
  Top Layer w0.3: R15.2@15.074,27.9 15.274,27.7 v1(16.5,27.7)
  Bottom Layer w0.2: v1(16.5,27.7) 22.7,33.9 29.2,33.9 34.35,28.75 34.35,26.75 v1(34.4,26.7)
LED_R_MCU: DD1.30 R13.2 | length 28.4
  Top Layer w0.2: v1(33.1,26.7) 33.518,26.282 DD1.30
  Top Layer w0.3: R13.2@15.13,24.9 15.23,24.8 v1(17.1,24.8)
  Bottom Layer w0.2: v1(17.1,24.8) 19.7,27.4 19.7,30.334 21.766,32.4 29.7,32.4 33.1,29 v1(33.1,26.7)
NetC3_1: C3.1 R7.2 XP7.1 | length 13.6
  Top Layer w0.2: XP7.1@47.782,6.083 XP7.1@47.899,6.2
  Top Layer w0.5: C3.1 36.613,5.56 38.66,5.56 40.693,7.593 41.718,7.593 R7.2 41.725,6.375 42.017,6.083 XP7.1@47.782,6.083
NetC6_2: C6.2 DD1.10 | length 5.3
  Top Layer w0.2: DD1.10 41.218,21.7
  Top Layer w0.5: 41.218,21.7 41.737,22.219 43.1,22.219 43.675,21.643 44.4,21.643 C6.2
NetC8_2: C8.2 DD1.40 ZQ1.1 | length 13.1
  Top Layer w0.2: C8.2@22.458,20.271 22.458,21.258 22.7,21.5 22.7,22.5 24.8,22.5 25.6,23.3 26.9,23.3 27.3,22.9 27.3,22 28,21.3 DD1.40
NetC9_2: C9.2 C12.2 C16.2 C19.1 DD1.6 DD1.24 DD1.41 | length 22.5
  Top Layer w0.2: C9.2@26.4,21.525 C9.2 27.1,21.5 27.7,20.9 DD1.41 ; v1@35.31,30.1 35.367,30.157 v1@35.367,30.319 ; DD1.24 35.918,26.218 ; DD1.6 41.141,20.1 41.283,20.3
  Top Layer w0.4: 41.283,20.3 42.581,20.3 42.981,19.9 C16.2
  Top Layer w0.5: C9.2@26.4,21.525 v1(26.4,22.6) ; v1(44.418,18.8) 44.431,18.812 44.431,19.887 C16.2
  Top Layer w0.7: v1(34.5,30.1) v1(35.475,30.1) ; C19.1 35,30.686 v1@35.367,30.319 ; v1@35.31,30.1 v1(35.475,30.1) ; 35.918,26.218 36.075,26.375 36.075,29.675 v1(36.5,30.1) v1(35.475,30.1)
NetC10_2: C10.2 DD1.62 L1.1 | length 6.3
  Top Layer w0.2: DD1.62 37.918,13.994 C10.2
  Top Layer w0.5: L1.1 C10.2@38.015,13.891
NetC13_2: C13.2 C17.1 DD1.11 | length 9.2
  Top Layer w0.2: DD1.11 40.668,22.1 41.654,23.086 41.682,23.086
  Top Layer w0.5: 41.682,23.086 44.243,23.086 44.443,23.286 C13.2
  Top Layer w0.7: C13.2 44.443,25.675 45.368,26.6 C17.1
NetC14_2: C14.2 DD1.39 ZQ1.3 | length 14.8
  Top Layer w0.2: C14.2 19.7,24 20.3,24.6 ZQ1.3@21,24.6 ; ZQ1.3@21.4,23.9 22,23.3 24.9,23.3 25.4,23.8 27.2,23.8 27.7,23.3 27.7,22.2 28.2,21.7 DD1.39
NetC22_2: C22.2 DD1.15 R21.2 | length 18.1
  Top Layer w0.2: DD1.15 40.5,23.7 40.9,24.1 40.9,25.3 47.5,31.9 47.5,35.206 47.188,35.519 46.5,35.519 C22.2
  Top Layer w0.3: 46.5,35.519 R21.2
NetDD1_33: DD1.33 DD2.7 R29.1 | length 13.2
  Top Layer w0.2: DD2.7 28.36,29.7 29.4,29.7 30.6,30.9 30.6,31.85 31.65,31.85 32.5,31 32.5,27.7 31.793,26.993 DD1.33
NetDD1_34: DD1.34 DD2.3 R28.1 | length 16.7
  Top Layer w0.2: R28.1 20.455,27.6 20.888,28.034 20.888,28.053 21.2,28.365 v1(21.2,28.5) 21.218,28.482 22.858,28.482 DD2.3 ; v1(29.6,25.9) 29.735,25.9 30.5,25.135 30.5,24.344 31.144,23.7 DD1.34
  Bottom Layer w0.2: v1(21.2,28.5) 21.2,28.4 23.2,26.4 26.8,26.4 27.3,25.9 v1(29.6,25.9)
NetDD1_35: DD1.35 DD2.2 R27.1 | length 19.4
  Top Layer w0.2: R27.1 20.765,29.5 21.065,29.8 v1(21.2,29.8) 21.233,29.767 22.842,29.767 DD2.2 DD2.2@22.342,29.735 ; R27.1@19.75,29.6 R27.1@19.95,29.4 ; v1(29.6,24.6) 29.6,24.5 30.8,23.3 DD1.35
  Bottom Layer w0.2: v1(21.2,29.8) 20.5,29.1 20.5,28.2 22.8,25.9 26.585,25.9 27.885,24.6 v1(29.6,24.6)
NetDD1_36: DD1.36 DD2.5 R26.1 | length 7.5
  Top Layer w0.2: DD2.5 28.185,27.195 28,27.01 28,25.25 R26.1 27.95,24.45 28.7,23.7 29.8,23.7 30.6,22.9 DD1.36
NetDD1_37: DD1.37 DD2.1 R25.2 | length 20.8
  Top Layer w0.2: R25.2 20.681,31.4 21.123,30.958 v1(21.242,30.958) ; v1@21.242,31.002 21.264,30.981 22.851,30.981 DD2.1 ; v1(29.6,22.9) 29.719,22.9 30.119,22.5 DD1.37
  Bottom Layer w0.2: v1(21.242,30.958) 21.158,30.958 20.1,29.9 20.1,28 22.6,25.5 26.419,25.5 28.95,22.969 29.531,22.969 v1(29.6,22.9)
NetDD1_38: DD1.38 DD2.6 R24.2 | length 14.1
  Top Layer w0.2: DD2.6 30.199,28.465 R24.2 30.2,28.438 v1(30.2,27.1) ; v1(28.5,22.5) 28.619,22.5 29.019,22.1 DD1.38
  Bottom Layer w0.2: v1(28.5,22.5) 29,22 30.088,22 30.7,22.612 30.7,26.6 v1(30.2,27.1)
NetHL1_2: HL1.2 R13.1 | length 2.6
  Top Layer w0.3: HL1.2@11.152,24.978 R13.1@13.752,24.978
NetHL2_2: HL2.2 R14.1 | length 2.5
  Top Layer w0.3: HL2.2@11.202,30.578 R14.1@13.752,30.578
NetHL3_2: HL3.2 R15.1 | length 2.6
  Top Layer w0.3: HL3.2@11.186,27.8 R15.1@13.786,27.8
NetR1_1: R1.1 XP2.1 | length 5.9
  Top Layer w0.2: R1.1 51.45,36.59 XP2.1
NetR2_2: R2.2 VD2.1 VT1.2 XP4.2 | length 14
  Top Layer w0.2: VD2.1 11.75,20.85 12.526,21.626 VT1.2 14.101,20.701 13.6,20.2 13.6,17.6 13.9,17.3 R2.2
  Top Layer w0.25: XP4.2 7.55,21.15 7.85,20.85 VD2.1
NetR5_2: R5.2 VD2.2 VT2.2 XP4.4 | length 13.1
  Top Layer w0.2: VD2.2 8.8,18.2 12.1,14.9 R5.2 14.7,14.8 15.2,14.8 15.808,15.408 VT2.2
  Top Layer w0.25: XP4.4 7.75,18.65 8.05,18.95 VD2.2
NetR8_2: R8.2 R9.2 VT3.1 | length 4.2
  Top Layer w0.2: R8.2 47.204,9.65 47.529,9.325 49.133,9.325 49.333,9.125 VT3.1
NetR12_1: R12.1 XP5.5 | length 3.6
  Top Layer w0.2: R12.1@60.556,30.9 R12.1@60.606,30.85
  Top Layer w0.32: R12.1@60.606,30.85 XP5.5@64.1,30.85
NetVD1_1: VD1.1 XP1.1 | length 3.6
  Top Layer w0.5: XP1.1 8.2,33.1 8.695,33.595 8.695,34.255 VD1.1
nRST_MCU: C21.2 DD1.14 R20.2 XP3.6 | length 55.7
  Top Layer w0.2: DD1.14 41.118,23.3 v1(41.918,24.1) 41.918,25.618 47.9,31.6 47.9,35.206 48.163,35.469 48.9,35.469 C21.2
  Top Layer w0.3: 48.9,35.469 R20.2@48.9,36.256
  Bottom Layer w0.25: XP3.6 18.538,6.3 23.5,6.3 23.8,6.6 23.8,10.1 32.9,19.2 32.9,23 34,24.1 v1(41.918,24.1)
TEMP_I2C_SCLK: DD1.64 R10.1 VD4.2 XP5.3 XP6.3 | length 51.8
  Top Layer w0.2: DD1.64 40.625,17.175 42.55,15.25 49.45,15.25 51.4,17.2 51.4,21.9 51.95,22.45 R10.1 54.6,22.45 VD4.2 58.75,22.35 59.5,23.1 59.5,27.5
  Top Layer w0.3: VD4.2 54.7,18.7 55.5,17.9 58.4,17.9 61.9,14.4 XP6.3@64.1,14.4
  Top Layer w0.32: 59.5,27.5 60.35,28.35 XP5.3@64.1,28.35
TEMP_I2C_SDA: DD1.1 R11.1 VD4.1 XP5.4 XP6.4 | length 57.1
  Top Layer w0.2: DD1.1 40.418,18.1 42.818,15.7 49.2,15.7 51,17.5 51,23.4 51.85,24.25 R11.1 VD4.1@54.6,24.25 ; v1(54.6,26.9) 54.6,24.35 VD4.1 ; XP6.4@64.05,15.7 XP6.4@64.1,15.65
  Top Layer w0.3: VD4.1 57.15,24.25 58.4,25.5 58.4,28.4 ; v1(56.3,19) 58.6,19 61.9,15.7 XP6.4@64.05,15.7
  Top Layer w0.32: 58.4,28.4 59.6,29.6 XP5.4@64.1,29.6
  Bottom Layer w0.2: v1(54.6,26.9) 54.6,20.1 55.65,19.05 56.25,19.05 v1(56.3,19)
UART_RX_MCU: DD1.7 R1.2 R3.1 VD3.2 | length 29.1
  Top Layer w0.2: DD1.7 40.293,20.5 40.943,21.15 42.293,21.15 42.293,21.413 v1(42.3,21.419) ; R3.1@52.75,31.9 R1.2 VD3.2 54.9,34.55 v1(54.9,35.9)
  Bottom Layer w0.2: v1(42.3,21.419) 42.319,21.419 54.9,34 v1(54.9,35.9)
UART_TX_MCU: DD1.4 VD3.1 XP2.2 | length 35.2
  Top Layer w0.2: DD1.4 40.468,19.3 v1(42.418,17.35) ; XP2.2 56.85,39.068 VD3.1 v1(58.5,34.5)
  Bottom Layer w0.2: v1(42.418,17.35) 42.4,17.368 42.4,20.6 54.9,33.1 57.1,33.1 v1(58.5,34.5)
pads on no net: DD1.2 DD1.3 DD1.8 DD1.12 DD1.16 DD1.21 DD1.22 DD1.23 DD1.25 DD1.26 DD1.28 DD1.31 DD1.32 DD1.49 DD1.50 DD1.51 DD1.53 DD1.55 DD1.56 DD1.57 DD1.60 DD1.61 XP1.M XP4.1 XP4.M XP5.M XP6.M XP7.M ZQ1.2 ZQ1.4

## Polygon pours and split planes (outlines as drawn)
GND on Top Layer "GND_L01_P011" (solid, pour order 11): 0,45 0,0 69.5,0 69.5,45
AGND on Top Layer "AGND_L01_P000" (solid, pour order 0): 38.499,16.401 38.5,16.498 38.215,16.5 38.215,15 39.9,15 39.9,11.97 36.5,11.97 36.5,10.2 34.93,10.2 34.93,9.1 41.2,9.1 41.2,12.1 43,13.9 49.7,13.9 51.9,11.7 51.9,4.9 52.9,4.9 52.9,16.1 51.8,16.1 50.9,15.2 50.5,14.8 41.9,14.8 40.3,16.4
GND on Top Layer "GND_L01_P010" (solid, pour order 10): 43.9,32.3 43.9,29.5 44.6,29.5 45.2,30.1 45.832,30.693 46.3,31.1 46.7,31.5 46.7,32.3
GND on Top Layer "GND_L01_P009" (solid, pour order 9): 41,32.3 42.6,32.3 42.6,28.8 41.9,28.1 41.7,28.1 41.1,28.1 41,28.2
+3V3 on Top Layer "+3V3_L01_P008" (solid, pour order 8): 41.178,38.5 38,38.5 38,33.014 39.5,33.014 39.5,36.3 40.2,37 41.178,37
+3V3 on Top Layer "+3V3_L01_P002" (solid, pour order 2): 31.3,12 31.3,12.5 31.3,13.1 33.5,13.1 33.5,10.6 31.3,10.6
+3V3 on Top Layer "+3V3_L01_P001" (solid, pour order 1): 32.3,35.5 33.9,35.5 33.9,39.1 32.3,39.1
GND on Bottom Layer "GND_L04_P012" (solid, pour order 12): 0,45 0,0 69.5,0 69.5,45
+3V3 on Layer 2 (split plane): 67.695,44.482 67.889,44.454 68.078,44.406 68.262,44.34 68.439,44.257 68.607,44.156 68.764,44.04 68.908,43.908 69.04,43.764 69.156,43.607 69.257,43.439 69.34,43.262 69.406,43.078 69.454,42.889 69.482,42.695 69.491,42.516 69.49,42.5 69.49,2.5 69.491,2.484 69.482,2.305 69.454,2.111 69.406,1.922 69.34,1.738 69.257,1.561 69.156,1.393 69.04,1.236 68.908,1.092 68.764,0.96 68.607,0.844 68.439,0.743 68.262,0.66 68.078,0.594 67.889,0.546 67.695,0.518 67.516,0.509 67.5,0.51 2.5,0.51 2.484,0.509 2.305,0.518 2.111,0.546 1.922,0.594 1.738,0.66 1.561,0.743 1.393,0.844 1.236,0.96 1.092,1.092 0.96,1.236 0.844,1.393 0.743,1.561 0.66,1.738 0.594,1.922 0.546,2.111 0.518,2.305 0.509,2.484 0.51,2.5 0.51,42.5 0.509,42.516 0.518,42.695 0.546,42.889 0.594,43.078 0.66,43.262 0.743,43.439 0.844,43.607 0.96,43.764 1.092,43.908 1.236,44.04 1.393,44.156 1.561,44.257 1.738,44.34 1.922,44.406 2.111,44.454 2.305,44.482 2.484,44.491 2.5,44.49 67.5,44.49 67.516,44.491
NetC9_2 on Layer 2 (split plane): 45.549,21.637 45.549,18.151 44.263,18.151 43.607,18.807 37.607,24.807 37.576,24.831 37.561,24.837 37.539,24.846 37.5,24.851 34.995,24.851 34.955,24.846 34.919,24.831 34.888,24.807 34.638,24.557 32.845,22.764 30.632,20.551 26.863,20.551 24.964,22.45 25.963,23.449 26.637,23.449 27.249,22.837 27.249,22.1 27.254,22.061 27.263,22.039 27.269,22.024 27.293,21.993 27.893,21.393 27.924,21.369 27.939,21.363 27.961,21.354 28,21.349 30.4,21.349 30.439,21.354 30.461,21.363 30.476,21.369 30.507,21.393 31.007,21.893 31.507,22.393 31.531,22.424 31.546,22.461 31.551,22.5 31.551,25.4 31.551,28.137 34.463,31.049 36.137,31.049